# EAGLE board ESP32-S2_Thing_Plus-Panel (EAGLE 9.6.2), part 1 of 5
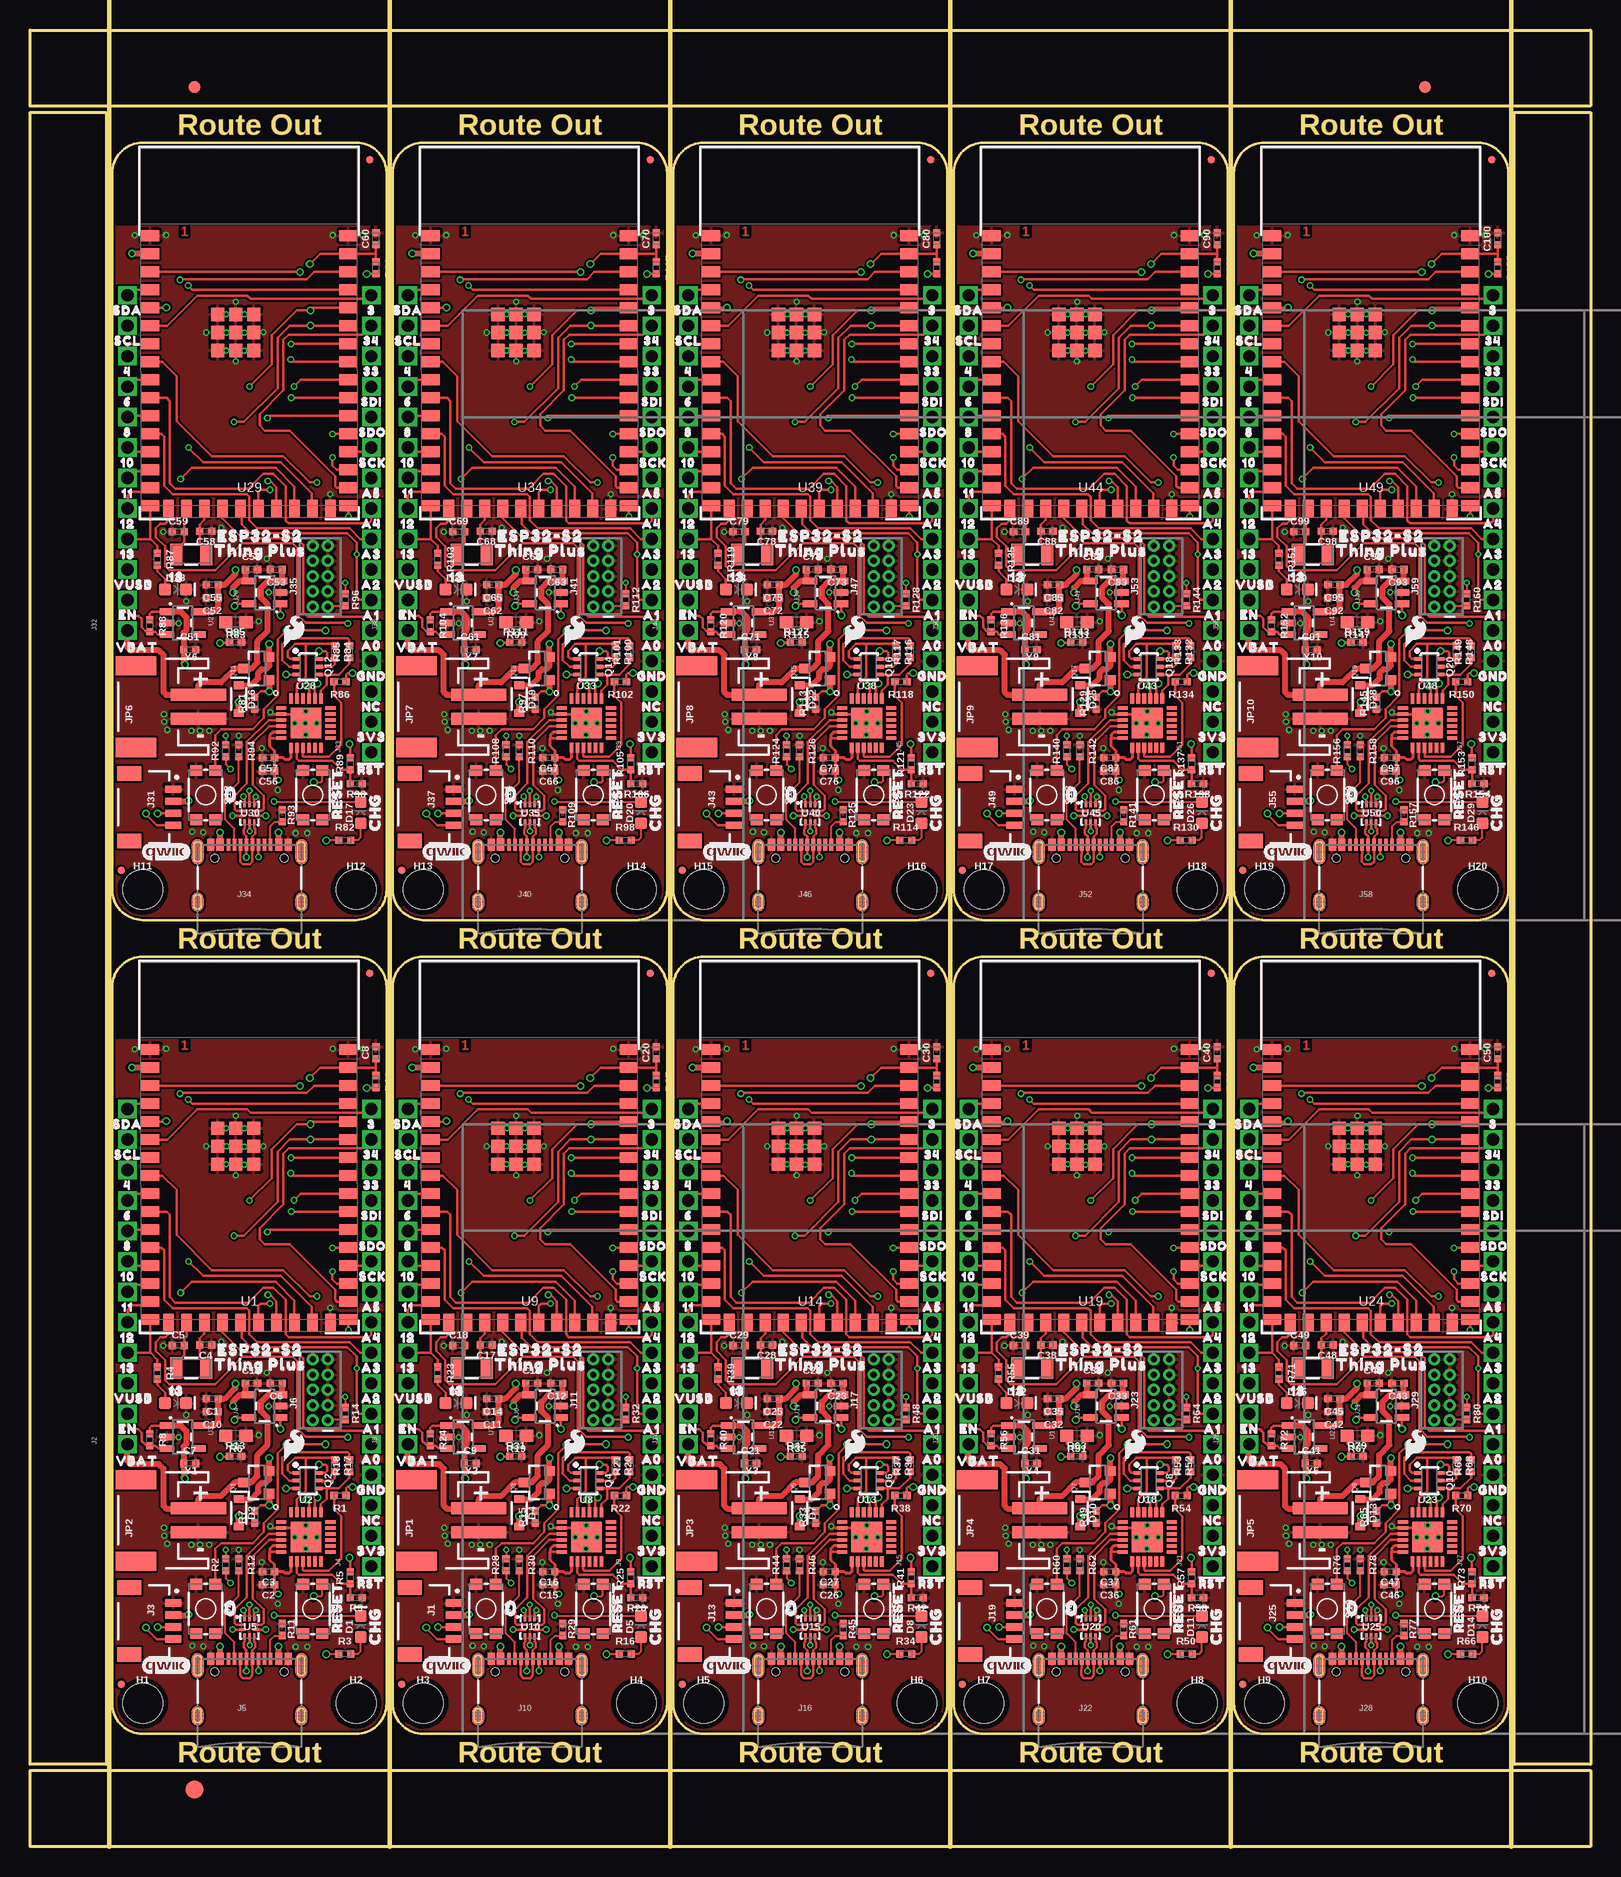
[diagram p0: board, top side]
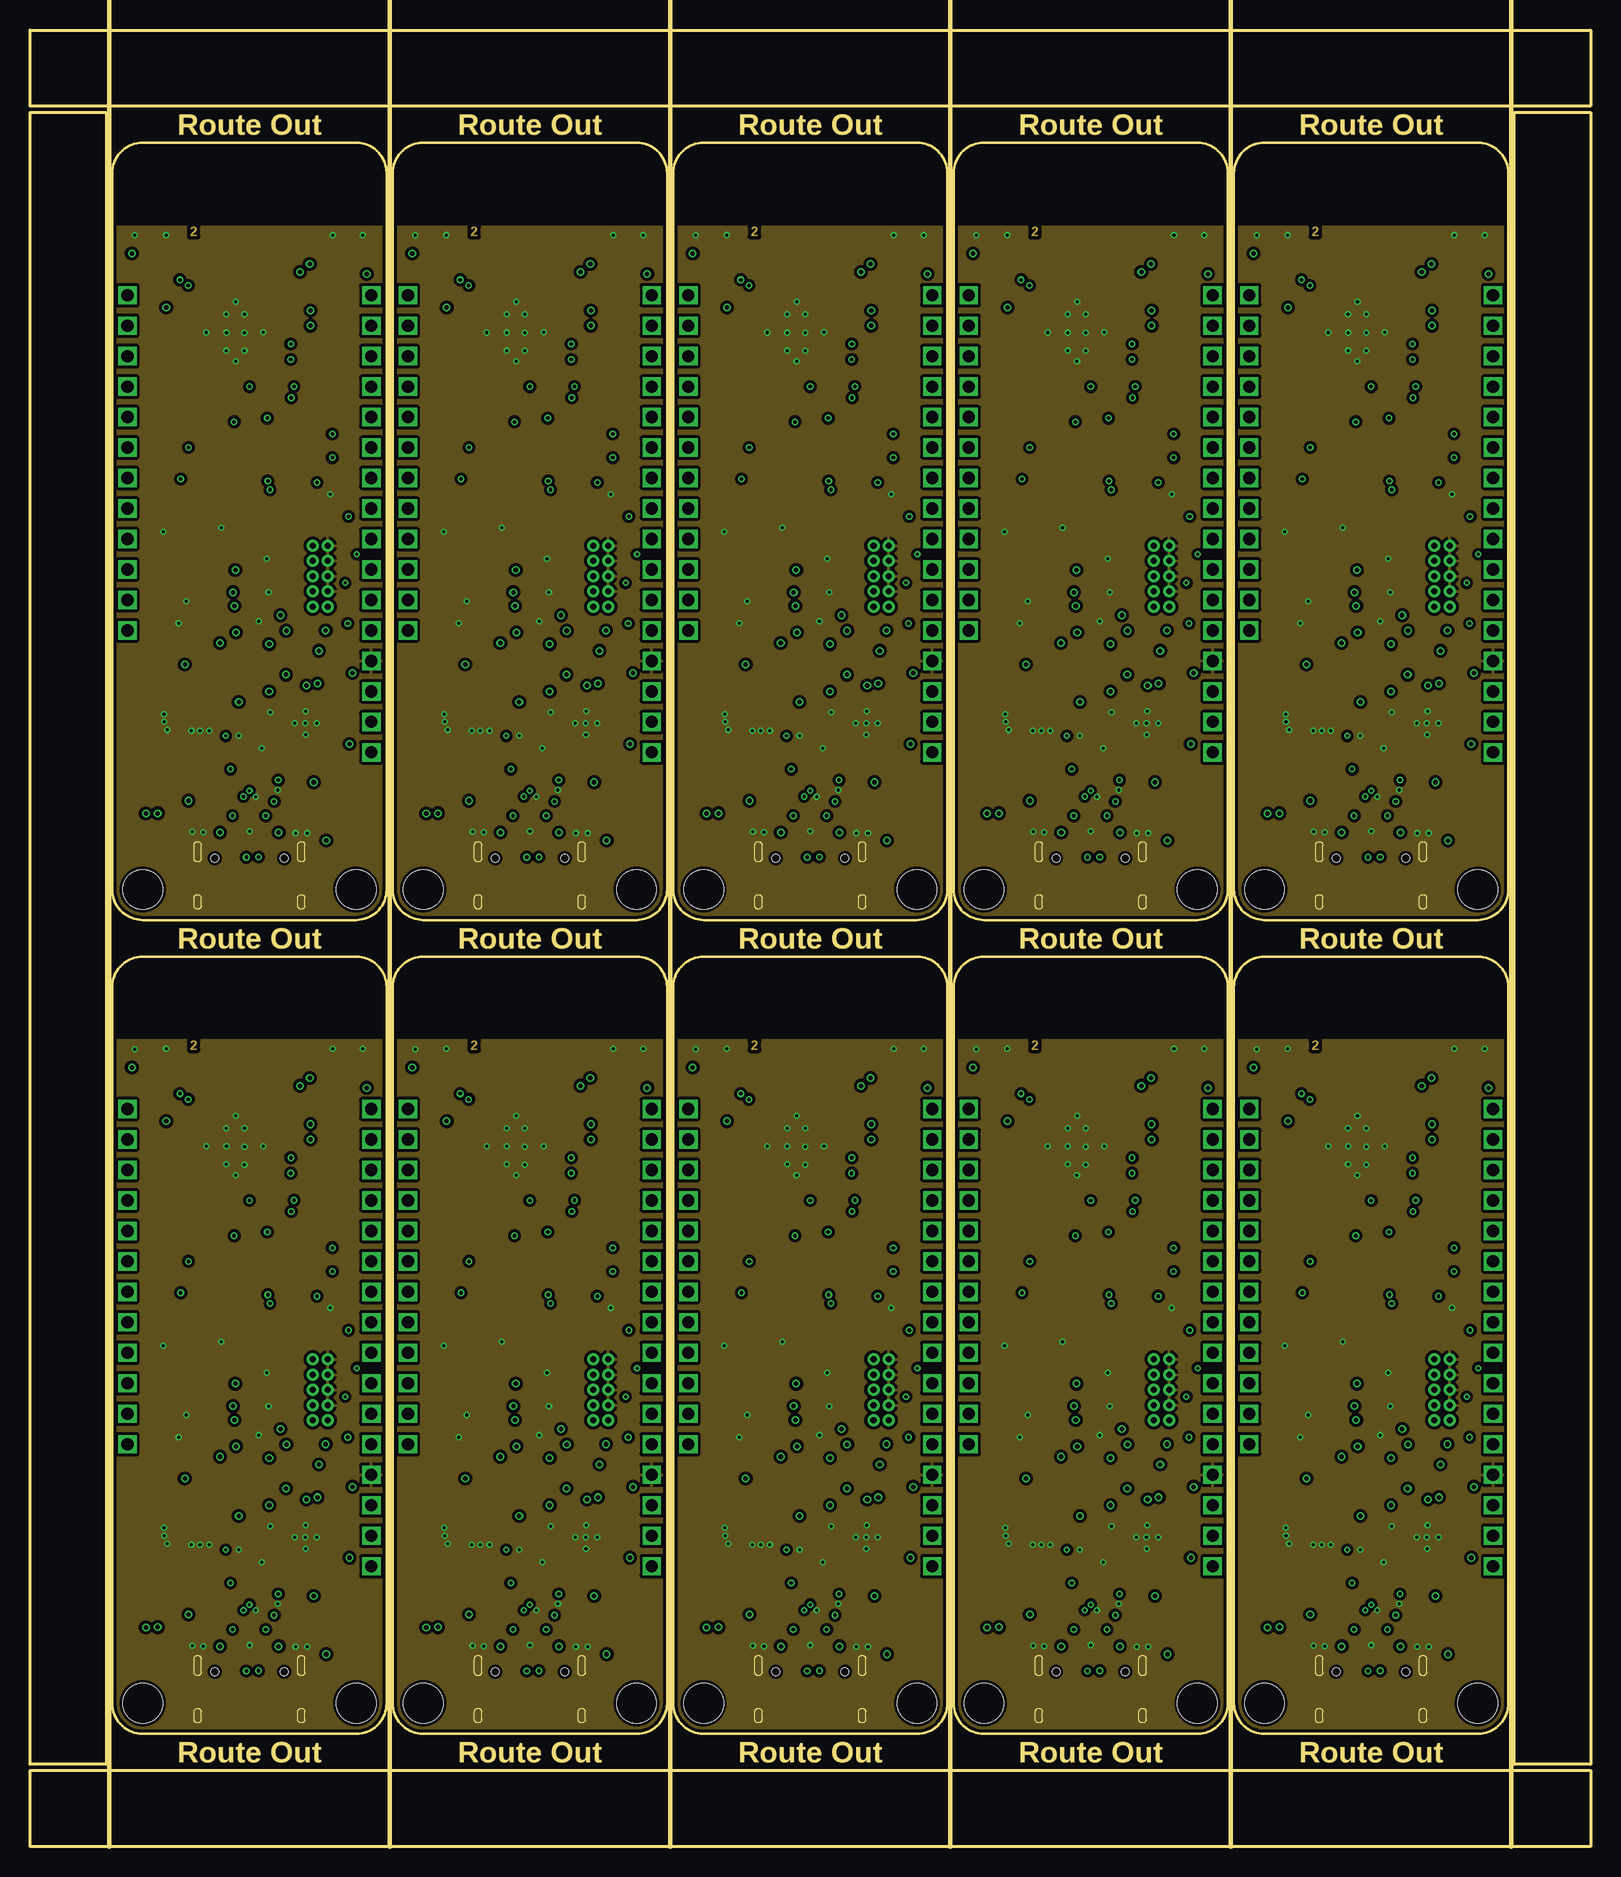
[diagram p1: board, inner layer Route2]
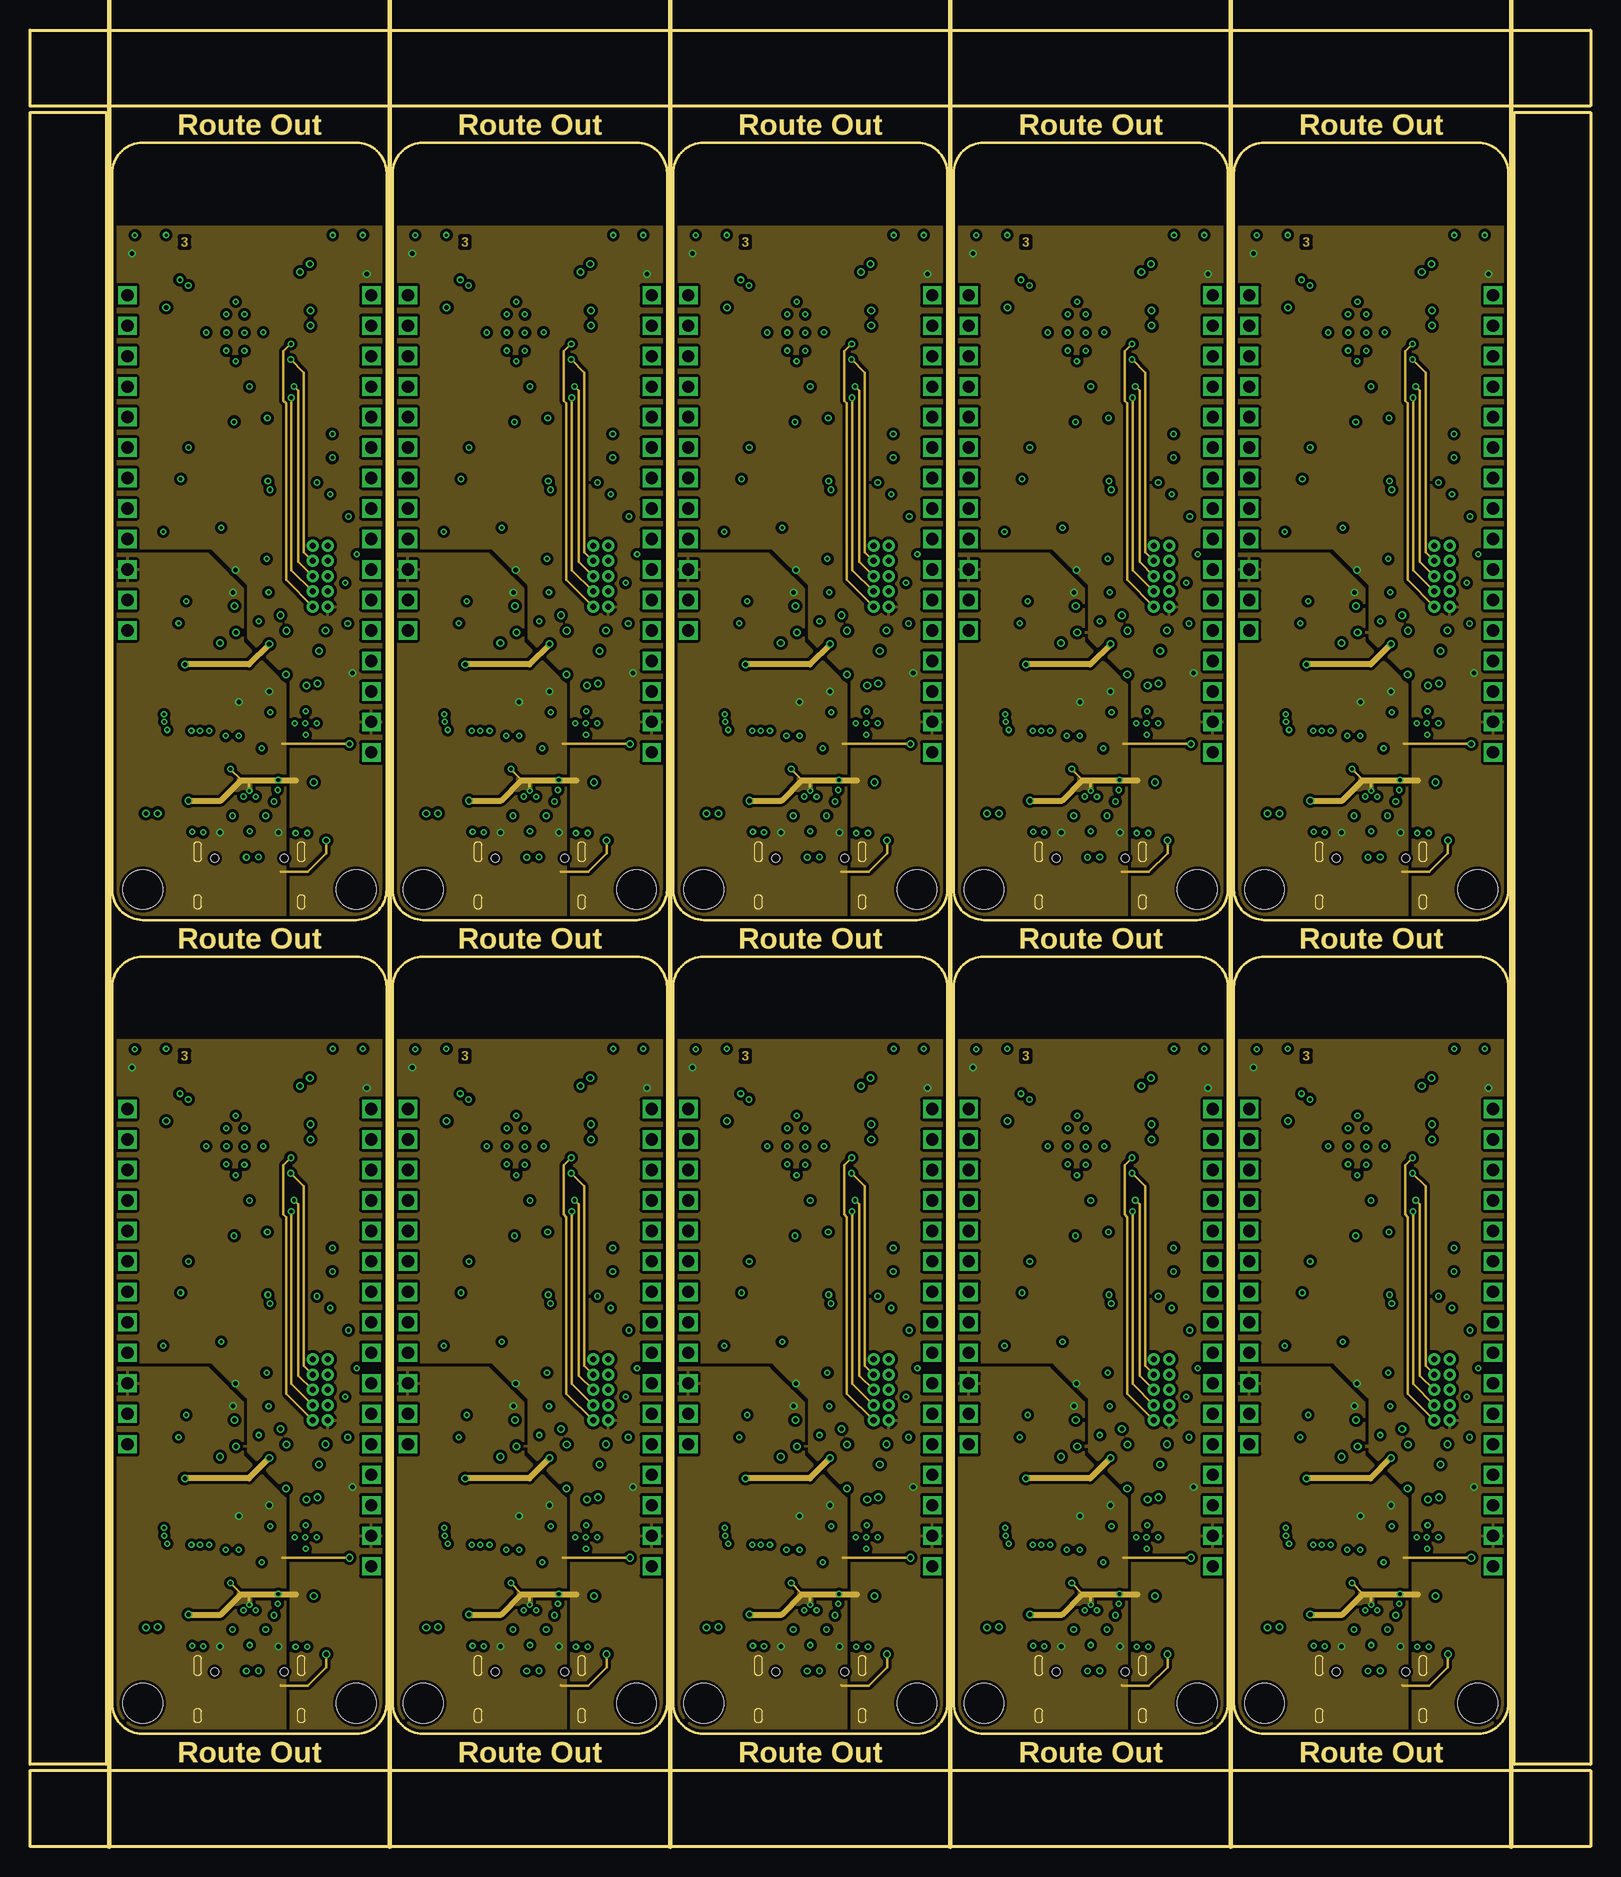
[diagram p2: board, inner layer Route15]
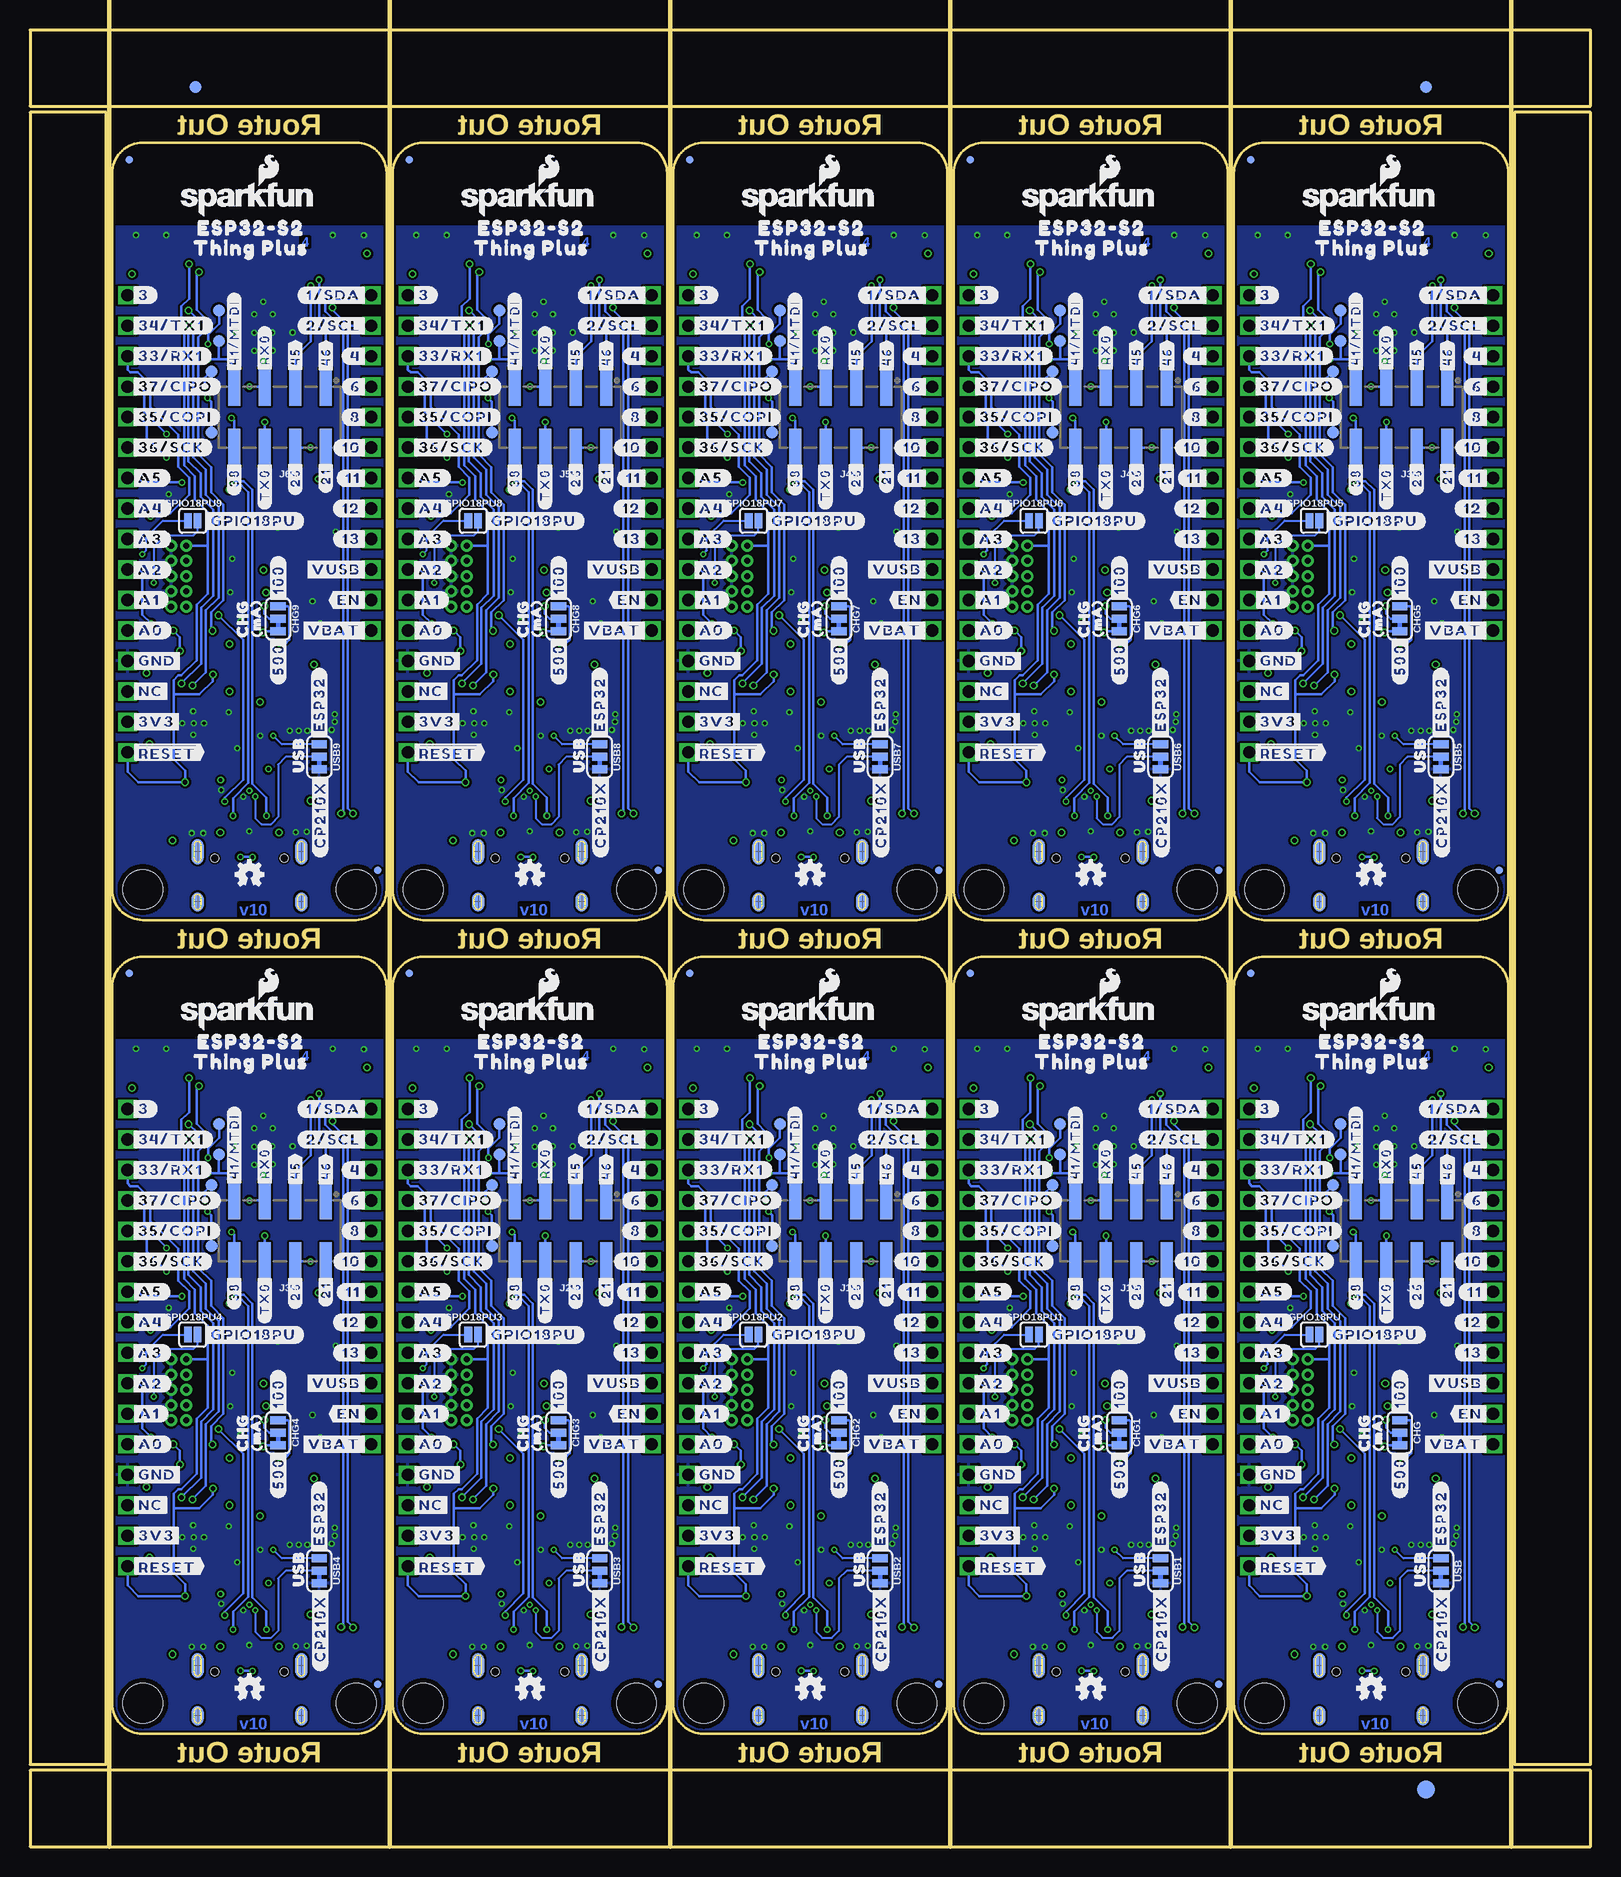
[diagram p3: board, bottom side, seen from below]

Size 130.05 x 151.38 mm. Coordinates in mm from the lower left corner, seen from the top.
Outline: 29.72,11.94 29.72,71.63 arc90 27.18,74.17 9.4,74.17 arc90 6.86,71.63 6.86,11.94 arc90 9.4,9.4 27.18,9.4 arc90 29.72,11.94
Outline: 53.09,11.94 53.09,71.63 arc90 50.55,74.17 32.77,74.17 arc90 30.23,71.63 30.23,11.94 arc90 32.77,9.4 50.55,9.4 arc90 53.09,11.94
Outline: 76.45,11.94 76.45,71.63 arc90 73.91,74.17 56.13,74.17 arc90 53.59,71.63 53.59,11.94 arc90 56.13,9.4 73.91,9.4 arc90 76.45,11.94
Outline: 99.82,11.94 99.82,71.63 arc90 97.28,74.17 79.5,74.17 arc90 76.96,71.63 76.96,11.94 arc90 79.5,9.4 97.28,9.4 arc90 99.82,11.94
Outline: 123.19,11.94 123.19,71.63 arc90 120.65,74.17 102.87,74.17 arc90 100.33,71.63 100.33,11.94 arc90 102.87,9.4 120.65,9.4 arc90 123.19,11.94
Outline: 29.72,79.76 29.72,139.45 arc90 27.18,141.99 9.4,141.99 arc90 6.86,139.45 6.86,79.76 arc90 9.4,77.22 27.18,77.22 arc90 29.72,79.76
Outline: 53.09,79.76 53.09,139.45 arc90 50.55,141.99 32.77,141.99 arc90 30.23,139.45 30.23,79.76 arc90 32.77,77.22 50.55,77.22 arc90 53.09,79.76
Outline: 76.45,79.76 76.45,139.45 arc90 73.91,141.99 56.13,141.99 arc90 53.59,139.45 53.59,79.76 arc90 56.13,77.22 73.91,77.22 arc90 76.45,79.76
Outline: 99.82,79.76 99.82,139.45 arc90 97.28,141.99 79.5,141.99 arc90 76.96,139.45 76.96,79.76 arc90 79.5,77.22 97.28,77.22 arc90 99.82,79.76
Outline: 123.19,79.76 123.19,139.45 arc90 120.65,141.99 102.87,141.99 arc90 100.33,139.45 100.33,79.76 arc90 102.87,77.22 120.65,77.22 arc90 123.19,79.76
Outline: 0,6.35 130.05,6.35 130.05,0 0,0 0,6.35
Outline: 123.7,144.53 130.05,144.53 130.05,6.86 123.7,6.86 123.7,144.53
Outline: 0,151.38 130.05,151.38 130.05,145.03 0,145.03 0,151.38
Outline: 0,144.53 6.35,144.53 6.35,6.86 0,6.86 0,144.53
Copper layers (1*2*15*16): Top 0.035559375mm / dielectric 0.47751875mm / Route2 0.035559375mm / dielectric 0.47751875mm / Route15 0.035559375mm / dielectric 0.47751875mm / Bottom 0.035559375mm
Design rules "ESP32-S2_Thing_Plus": minimum track width 5mil, minimum drill 0.2mm, track to track 5mil, track to pad 5mil, pad to pad 5mil, via to via 5mil, smd to smd 5mil, copper to edge 7mil, drill to drill 7mil, minimum pad ring 5mil, minimum via ring 5mil, stop-mask expansion 2.5mil, vias tented up to drill 25mil, thermal gap 10mil
tRestrict: area 24.4,25.7 to 24.4,25.9; area 21.6,25.7 to 21.6,26; area 22.9,24.4 to 23.1,24.5; area 22.8,27.2 to 23.1,27.2; area 47.7,25.7 to 47.8,25.9; area 44.9,25.7 to 45,26; area 46.2,24.4 to 46.5,24.5; area 46.2,27.2 to 46.5,27.2; area 71.1,25.7 to 71.2,25.9; area 68.3,25.7 to 68.4,26; area 69.6,24.4 to 69.8,24.5; area 69.6,27.2 to 69.8,27.2; area 94.5,25.7 to 94.5,25.9; area 91.7,25.7 to 91.7,26; area 93,24.4 to 93.2,24.5; area 92.9,27.2 to 93.2,27.2; area 117.8,25.7 to 117.9,25.9; area 115,25.7 to 115.1,26; area 116.3,24.4 to 116.6,24.5; area 116.3,27.2 to 116.6,27.2; area 24.4,93.5 to 24.4,93.8; area 21.6,93.5 to 21.6,93.8; area 22.9,92.2 to 23.1,92.3; area 22.8,95 to 23.1,95.1; area 47.7,93.5 to 47.8,93.8; area 44.9,93.5 to 45,93.8; area 46.2,92.2 to 46.5,92.3; area 46.2,95 to 46.5,95.1; area 71.1,93.5 to 71.2,93.8; area 68.3,93.5 to 68.4,93.8; area 69.6,92.2 to 69.8,92.3; area 69.6,95 to 69.8,95.1; area 94.5,93.5 to 94.5,93.8; area 91.7,93.5 to 91.7,93.8; area 93,92.2 to 93.2,92.3; area 92.9,95 to 93.2,95.1; area 117.8,93.5 to 117.9,93.8; area 115,93.5 to 115.1,93.8; area 116.3,92.2 to 116.6,92.3; area 116.3,95 to 116.6,95.1
Milling: 6 lines

## Footprints (pad centres in the part's own frame; a part is rotated, then mirrored left to right if it is on the bottom)
0402-TIGHT = smd 0.6 x 0.6: 1 -0.5,0; 2 0.5,0
SMT-JUMPER_3_1-NC_TRACE_SILK = smd 0.66 x 1.27: 1 -1.041,0; 2 0,0; 3 1.041,0
LED-0603 = smd 1 x 1: A -0.877,0; C 0.877,0
SOD-323 = smd 0.63 x 0.83: A 1.15,0; C -1.15,0
FIDUCIAL-1X2 = smd 1 x 1: 1 0,0
FIDUCIAL-1.5X3 = smd 1.5 x 1.5: 1 0,0
FIDUCIAL-MICRO = smd 0.635 x 0.635: 1 0,0
SMT-JUMPER_2_NO_SILK = smd 0.635 x 1.27: 1 -0.406,0; 2 0.406,0
STAND-OFF = hole 3.302: 0,0
JST04_1MM_RA = smd 0.6 x 1.35: 1 -1.5,0; 2 -0.5,0; 3 0.5,0; 4 1.5,0 | smd 1.2 x 2: NC1 2.8,-3.675; NC2 -2.8,-3.675
1X12_SM_SQ_NOSILK = drill 1.016 pad 1.27 square: 1 0,0; 2 2.54,0; 3 5.08,0; 4 7.62,0; 5 10.16,0; 6 12.7,0; 7 15.24,0; 8 17.78,0; 9 20.32,0; 10 22.86,0; 11 25.4,0; 12 27.94,0
1X16_SM_SQ_NOSILK = drill 1.016 pad 1.27 square: 1 0,0; 2 2.54,0; 3 5.08,0; 4 7.62,0; 5 10.16,0; 6 12.7,0; 7 15.24,0; 8 17.78,0; 9 20.32,0; 10 22.86,0; 11 25.4,0; 12 27.94,0; 13 30.48,0; 14 33.02,0; 15 35.56,0; 16 38.1,0
USB-C-16P-4LAYER-ISOLATED = smd 0.3 x 1: A5 -1.25,-0.34; A6 -0.25,-0.34; A7 0.25,-0.34; A8 1.25,-0.34; B5 1.75,-0.34; B6 0.75,-0.34; B7 -0.75,-0.34; B8 -1.75,-0.34 | smd 0.6 x 1: GND -3.225,-0.34; GND2 3.225,-0.34; VBUS1 -2.45,-0.34; VBUS2 2.45,-0.34 | smd 1 x 2.1: SHLD1 -4.32,-0.915; SHLD2 4.32,-0.915 | smd 1 x 2.1 bottom: SHLD3 -4.32,-0.915; SHLD4 4.32,-0.915 | smd 1 x 1.6: SHLD5 -4.32,-5.095; SHLD8 4.32,-5.095 | smd 1 x 1.6 bottom: SHLD6 -4.32,-5.095; SHLD7 4.32,-5.095 | hole 0.65: -2.89,-1.445; 2.89,-1.445
2X5-PTH-1.27MM-NO_SILK = drill 0.508 pad 1: 1 -2.54,-0.635; 2 -2.54,0.635; 3 -1.27,-0.635; 4 -1.27,0.635; 5 0,-0.635; 6 0,0.635; 7 1.27,-0.635; 8 1.27,0.635; 9 2.54,-0.635; 10 2.54,0.635
2X4_SMT_NO_POSTS_NS = smd 1 x 3.17: 1 -3.81,-2.54; 2 -3.81,2.54; 3 -1.27,-2.54; 4 -1.27,2.54; 5 1.27,-2.54; 6 1.27,2.54; 7 3.81,-2.54; 8 3.81,2.54
JST-2-SMD = smd 1 x 4.6: 1 -1,-3.7; 2 1,-3.7 | smd 1.6 x 3.4: NC1 -3.4,1.5; NC2 3.4,1.5
SOT23-3@1 = smd 0.8 x 0.9: 1 -0.95,-1; 2 0.95,-1; 3 0,1.1
SC70-6 = smd 0.3 x 0.66: 1 -0.65,-0.92; 2 0,-0.92; 3 0.65,-0.92; 4 0.65,0.92; 5 0,0.92; 6 -0.65,0.92
0603 = smd 1.1 x 1: 1 -0.85,0; 2 0.85,0
TACTILE_SWITCH_SMD_4.6X2.8MM = smd 0.9 x 1: 1 -2.05,-0.8; 2 2.05,-0.8; 3 2.05,0.8; 4 -2.05,0.8
TP_15TH = drill 0.381 pad 0.61: P$1 0,0
PAD.03X.04 = smd 1.016 x 1.016: P$1 0,0
ESP32-S2-WROOM = smd 0.9 x 1.5: 1 11.94,8.25; 2 10.44,8.25; 3 8.94,8.25; 4 7.44,8.25; 5 5.94,8.25; 6 4.44,8.25; 7 2.94,8.25; 8 1.44,8.25; 9 -0.06,8.25; 10 -1.56,8.25; 11 -3.06,8.25; 12 -4.56,8.25; 13 -6.06,8.25; 14 -7.56,8.25; 15 -9.06,8.25; 16 -10.56,8.25; 27 -10.56,-8.24; 28 -9.06,-8.24; 29 -7.56,-8.24; 30 -6.06,-8.24; 31 -4.56,-8.24; 32 -3.06,-8.24; 33 -1.56,-8.24; 34 -0.06,-8.24; 35 1.44,-8.24; 36 2.94,-8.24; 37 4.44,-8.24; 38 5.94,-8.24; 39 7.44,-8.24; 40 8.94,-8.24; 41 10.44,-8.24; 42 11.94,-8.24 | smd 1.5 x 0.9: 17 -10.82,6.75; 18 -10.82,5.25; 19 -10.82,3.75; 20 -10.82,2.25; 21 -10.82,0.75; 22 -10.82,-0.75; 23 -10.82,-2.25; 24 -10.82,-3.75; 25 -10.82,-5.25; 26 -10.82,-6.75 | smd 1.1 x 1.1: GNDEP0 3.88,1.15; GNDEP1 5.38,-0.35; GNDEP2 5.38,1.15; GNDEP3 5.38,2.65; GNDEP4 3.88,2.65; GNDEP5 2.38,2.65; GNDEP6 2.38,1.15; GNDEP7 2.38,-0.35; GNDEP8 3.88,-0.35
QFN24 = smd 0.85 x 0.3: 1 -2.05,1.25; 2 -2.05,0.75; 3 -2.05,0.25; 4 -2.05,-0.25; 5 -2.05,-0.75; 6 -2.05,-1.25; 13 2.05,-1.25; 14 2.05,-0.75; 15 2.05,-0.25; 16 2.05,0.25; 17 2.05,0.75; 18 2.05,1.25 | smd 0.3 x 0.85: 7 -1.25,-2.05; 8 -0.75,-2.05; 9 -0.25,-2.05; 10 0.25,-2.05; 11 0.75,-2.05; 12 1.25,-2.05; 19 1.25,2.05; 20 0.75,2.05; 21 0.25,2.05; 22 -0.25,2.05; 23 -0.75,2.05; 24 -1.25,2.05 | smd 2.55 x 2.55: PAD 0,0
SOT23-5 = smd 0.55 x 1.2: 1 -0.95,-1.3; 2 0,-1.3; 3 0.95,-1.3; 4 0.95,1.3; 5 -0.95,1.3
UQFN10 = smd 0.5 x 0.205: 1 -0.555,0.2; 2 -0.552,-0.2; 6 0.54,-0.2; 7 0.54,0.2 | smd 0.205 x 0.5: 3 -0.4,-0.74; 4 0,-0.74; 5 0.4,-0.74; 8 0.4,0.74; 9 0,0.743; 10 -0.4,0.743
CRYSTAL-SMD-3.2X1.5MM = smd 1 x 1.8: P$1 -1.25,0; P$2 1.25,0

## Placement (x,y rotation side)
C1  10uF  [0402-TIGHT]  15.19,37.33 180 top
C2  0.1uF  [0402-TIGHT]  19.87,21.81 180 top
C3  4.7uF  [0402-TIGHT]  19.87,22.91 180 top
C4  15pF  [0402-TIGHT]  14.64,41.8 180 top
C5  15pF  [0402-TIGHT]  12.35,41.76 0 top
C6  4.7uF  [0402-TIGHT]  20.52,38.6 180 top
C7  1.0uF  [0402-TIGHT]  13.31,31.93 0 top
C8  0.1uF  [0402-TIGHT]  28.83,66.17 90 top
C9  1.0uF  [0402-TIGHT]  36.68,31.93 0 top
C10  1.0uF  [0402-TIGHT]  15.18,36.24 180 top
C11  1.0uF  [0402-TIGHT]  38.55,36.24 180 top
C12  4.7uF  [0402-TIGHT]  43.89,38.6 180 top
C13  4.7uF  [0402-TIGHT]  41.82,38.61 0 top
C14  10uF  [0402-TIGHT]  38.56,37.33 180 top
C15  0.1uF  [0402-TIGHT]  43.24,21.81 180 top
C16  4.7uF  [0402-TIGHT]  43.24,22.91 180 top
C17  15pF  [0402-TIGHT]  38.01,41.8 180 top
C18  15pF  [0402-TIGHT]  35.72,41.76 0 top
C19  4.7uF  [0402-TIGHT]  18.45,38.61 0 top
C20  0.1uF  [0402-TIGHT]  52.2,66.17 90 top
C21  1.0uF  [0402-TIGHT]  60.05,31.93 0 top
C22  1.0uF  [0402-TIGHT]  61.92,36.24 180 top
C23  4.7uF  [0402-TIGHT]  67.26,38.6 180 top
C24  4.7uF  [0402-TIGHT]  65.19,38.61 0 top
C25  10uF  [0402-TIGHT]  61.93,37.33 180 top
C26  0.1uF  [0402-TIGHT]  66.6,21.81 180 top
C27  4.7uF  [0402-TIGHT]  66.61,22.91 180 top
C28  15pF  [0402-TIGHT]  61.38,41.8 180 top
C29  15pF  [0402-TIGHT]  59.09,41.76 0 top
C30  0.1uF  [0402-TIGHT]  75.56,66.17 90 top
C31  1.0uF  [0402-TIGHT]  83.41,31.93 0 top
C32  1.0uF  [0402-TIGHT]  85.29,36.24 180 top
C33  4.7uF  [0402-TIGHT]  90.62,38.6 180 top
C34  4.7uF  [0402-TIGHT]  88.56,38.61 0 top
C35  10uF  [0402-TIGHT]  85.3,37.33 180 top
C36  0.1uF  [0402-TIGHT]  89.97,21.81 180 top
C37  4.7uF  [0402-TIGHT]  89.97,22.91 180 top
C38  15pF  [0402-TIGHT]  84.74,41.8 180 top
C39  15pF  [0402-TIGHT]  82.46,41.76 0 top
C40  0.1uF  [0402-TIGHT]  98.93,66.17 90 top
C41  1.0uF  [0402-TIGHT]  106.78,31.93 0 top
C42  1.0uF  [0402-TIGHT]  108.65,36.24 180 top
C43  4.7uF  [0402-TIGHT]  113.99,38.6 180 top
C44  4.7uF  [0402-TIGHT]  111.93,38.61 0 top
C45  10uF  [0402-TIGHT]  108.66,37.33 180 top
C46  0.1uF  [0402-TIGHT]  113.34,21.81 180 top
C47  4.7uF  [0402-TIGHT]  113.34,22.91 180 top
C48  15pF  [0402-TIGHT]  108.11,41.8 180 top
C49  15pF  [0402-TIGHT]  105.82,41.76 0 top
C50  0.1uF  [0402-TIGHT]  122.3,66.17 90 top
C51  1.0uF  [0402-TIGHT]  13.31,99.75 0 top
C52  1.0uF  [0402-TIGHT]  15.18,104.05 180 top
C53  4.7uF  [0402-TIGHT]  20.52,106.42 180 top
C54  4.7uF  [0402-TIGHT]  18.45,106.43 0 top
C55  10uF  [0402-TIGHT]  15.19,105.15 180 top
C56  0.1uF  [0402-TIGHT]  19.87,89.63 180 top
C57  4.7uF  [0402-TIGHT]  19.87,90.73 180 top
C58  15pF  [0402-TIGHT]  14.64,109.62 180 top
C59  15pF  [0402-TIGHT]  12.35,109.58 0 top
C60  0.1uF  [0402-TIGHT]  28.83,133.99 90 top
C61  1.0uF  [0402-TIGHT]  36.68,99.75 0 top
C62  1.0uF  [0402-TIGHT]  38.55,104.05 180 top
C63  4.7uF  [0402-TIGHT]  43.89,106.42 180 top
C64  4.7uF  [0402-TIGHT]  41.82,106.43 0 top
C65  10uF  [0402-TIGHT]  38.56,105.15 180 top
C66  0.1uF  [0402-TIGHT]  43.24,89.63 180 top
C67  4.7uF  [0402-TIGHT]  43.24,90.73 180 top
C68  15pF  [0402-TIGHT]  38.01,109.62 180 top
C69  15pF  [0402-TIGHT]  35.72,109.58 0 top
C70  0.1uF  [0402-TIGHT]  52.2,133.99 90 top
C71  1.0uF  [0402-TIGHT]  60.05,99.75 0 top
C72  1.0uF  [0402-TIGHT]  61.92,104.05 180 top
C73  4.7uF  [0402-TIGHT]  67.26,106.42 180 top
C74  4.7uF  [0402-TIGHT]  65.19,106.43 0 top
C75  10uF  [0402-TIGHT]  61.93,105.15 180 top
C76  0.1uF  [0402-TIGHT]  66.6,89.63 180 top
C77  4.7uF  [0402-TIGHT]  66.61,90.73 180 top
C78  15pF  [0402-TIGHT]  61.38,109.62 180 top
C79  15pF  [0402-TIGHT]  59.09,109.58 0 top
C80  0.1uF  [0402-TIGHT]  75.56,133.99 90 top
C81  1.0uF  [0402-TIGHT]  83.41,99.75 0 top
C82  1.0uF  [0402-TIGHT]  85.29,104.05 180 top
C83  4.7uF  [0402-TIGHT]  90.62,106.42 180 top
C84  4.7uF  [0402-TIGHT]  88.56,106.43 0 top
C85  10uF  [0402-TIGHT]  85.3,105.15 180 top
C86  0.1uF  [0402-TIGHT]  89.97,89.63 180 top
C87  4.7uF  [0402-TIGHT]  89.97,90.73 180 top
C88  15pF  [0402-TIGHT]  84.74,109.62 180 top
C89  15pF  [0402-TIGHT]  82.46,109.58 0 top
C90  0.1uF  [0402-TIGHT]  98.93,133.99 90 top
C91  1.0uF  [0402-TIGHT]  106.78,99.75 0 top
C92  1.0uF  [0402-TIGHT]  108.65,104.05 180 top
C93  4.7uF  [0402-TIGHT]  113.99,106.42 180 top
C94  4.7uF  [0402-TIGHT]  111.93,106.43 0 top
C95  10uF  [0402-TIGHT]  108.66,105.15 180 top
C96  0.1uF  [0402-TIGHT]  113.34,89.63 180 top
C97  4.7uF  [0402-TIGHT]  113.34,90.73 180 top
C98  15pF  [0402-TIGHT]  108.11,109.62 180 top
C99  15pF  [0402-TIGHT]  105.82,109.58 0 top
C100  0.1uF  [0402-TIGHT]  122.3,133.99 90 top
CHG  [SMT-JUMPER_3_1-NC_TRACE_SILK]  15.9,34.49 270 bottom
CHG1  [SMT-JUMPER_3_1-NC_TRACE_SILK]  39.27,34.49 270 bottom
CHG2  [SMT-JUMPER_3_1-NC_TRACE_SILK]  62.64,34.49 270 bottom
CHG3  [SMT-JUMPER_3_1-NC_TRACE_SILK]  86,34.49 270 bottom
CHG4  [SMT-JUMPER_3_1-NC_TRACE_SILK]  109.37,34.49 270 bottom
CHG5  [SMT-JUMPER_3_1-NC_TRACE_SILK]  15.9,102.31 270 bottom
CHG6  [SMT-JUMPER_3_1-NC_TRACE_SILK]  39.27,102.31 270 bottom
CHG7  [SMT-JUMPER_3_1-NC_TRACE_SILK]  62.64,102.31 270 bottom
CHG8  [SMT-JUMPER_3_1-NC_TRACE_SILK]  86,102.31 270 bottom
CHG9  [SMT-JUMPER_3_1-NC_TRACE_SILK]  109.37,102.31 270 bottom
D1  Yellow  [LED-0603]  27.56,18.34 90 top
D2  1A/23V/620mV  [SOD-323]  17.4,27.81 270 top
D3  BLUE  [LED-0603]  12.14,36.96 0 top
D4  1A/23V/620mV  [SOD-323]  40.77,27.81 270 top
D5  Yellow  [LED-0603]  50.93,18.34 90 top
D6  BLUE  [LED-0603]  35.5,36.96 0 top
D7  1A/23V/620mV  [SOD-323]  64.14,27.81 270 top
D8  Yellow  [LED-0603]  74.3,18.34 90 top
D9  BLUE  [LED-0603]  58.87,36.96 0 top
D10  1A/23V/620mV  [SOD-323]  87.5,27.81 270 top
D11  Yellow  [LED-0603]  97.66,18.34 90 top
D12  BLUE  [LED-0603]  82.24,36.96 0 top
D13  1A/23V/620mV  [SOD-323]  110.87,27.81 270 top
D14  Yellow  [LED-0603]  121.03,18.34 90 top
D15  BLUE  [LED-0603]  105.61,36.96 0 top
D16  1A/23V/620mV  [SOD-323]  17.4,95.63 270 top
D17  Yellow  [LED-0603]  27.56,86.16 90 top
D18  BLUE  [LED-0603]  12.14,104.77 0 top
D19  1A/23V/620mV  [SOD-323]  40.77,95.63 270 top
D20  Yellow  [LED-0603]  50.93,86.16 90 top
D21  BLUE  [LED-0603]  35.5,104.77 0 top
D22  1A/23V/620mV  [SOD-323]  64.14,95.63 270 top
D23  Yellow  [LED-0603]  74.3,86.16 90 top
D24  BLUE  [LED-0603]  58.87,104.77 0 top
D25  1A/23V/620mV  [SOD-323]  87.5,95.63 270 top
D26  Yellow  [LED-0603]  97.66,86.16 90 top
D27  BLUE  [LED-0603]  82.24,104.77 0 top
D28  1A/23V/620mV  [SOD-323]  110.87,95.63 270 top
D29  Yellow  [LED-0603]  121.03,86.16 90 top
D30  BLUE  [LED-0603]  105.61,104.77 0 top
E$1  [FIDUCIAL-1X2]  13.72,146.62 0 top
E$2  [FIDUCIAL-1X2]  13.72,146.62 0 bottom
E$3  [FIDUCIAL-1X2]  116.27,146.62 0 top
E$4  [FIDUCIAL-1X2]  116.27,146.62 0 bottom
E$5  [FIDUCIAL-1.5X3]  13.72,4.76 0 top
E$6  [FIDUCIAL-1.5X3]  13.72,4.76 0 bottom
FD1  FIDUCIALUFIDUCIAL  [FIDUCIAL-MICRO]  28.32,72.77 0 top
FD2  FIDUCIALUFIDUCIAL  [FIDUCIAL-MICRO]  28.32,72.77 0 bottom
FD3  FIDUCIALUFIDUCIAL  [FIDUCIAL-MICRO]  7.6,13.54 0 top
FD4  FIDUCIALUFIDUCIAL  [FIDUCIAL-MICRO]  7.6,13.54 0 bottom
FD5  FIDUCIALUFIDUCIAL  [FIDUCIAL-MICRO]  51.69,72.77 0 top
FD6  FIDUCIALUFIDUCIAL  [FIDUCIAL-MICRO]  51.69,72.77 0 bottom
FD7  FIDUCIALUFIDUCIAL  [FIDUCIAL-MICRO]  30.97,13.54 0 top
FD8  FIDUCIALUFIDUCIAL  [FIDUCIAL-MICRO]  30.97,13.54 0 bottom
FD9  FIDUCIALUFIDUCIAL  [FIDUCIAL-MICRO]  75.06,72.77 0 top
FD10  FIDUCIALUFIDUCIAL  [FIDUCIAL-MICRO]  75.06,72.77 0 bottom
FD11  FIDUCIALUFIDUCIAL  [FIDUCIAL-MICRO]  54.34,13.54 0 top
FD12  FIDUCIALUFIDUCIAL  [FIDUCIAL-MICRO]  54.34,13.54 0 bottom
FD13  FIDUCIALUFIDUCIAL  [FIDUCIAL-MICRO]  98.42,72.77 0 top
FD14  FIDUCIALUFIDUCIAL  [FIDUCIAL-MICRO]  98.42,72.77 0 bottom
FD15  FIDUCIALUFIDUCIAL  [FIDUCIAL-MICRO]  77.71,13.54 0 top
FD16  FIDUCIALUFIDUCIAL  [FIDUCIAL-MICRO]  77.71,13.54 0 bottom
FD17  FIDUCIALUFIDUCIAL  [FIDUCIAL-MICRO]  121.79,72.77 0 top
FD18  FIDUCIALUFIDUCIAL  [FIDUCIAL-MICRO]  121.79,72.77 0 bottom
FD19  FIDUCIALUFIDUCIAL  [FIDUCIAL-MICRO]  101.07,13.54 0 top
FD20  FIDUCIALUFIDUCIAL  [FIDUCIAL-MICRO]  101.07,13.54 0 bottom
FD21  FIDUCIALUFIDUCIAL  [FIDUCIAL-MICRO]  28.32,140.59 0 top
FD22  FIDUCIALUFIDUCIAL  [FIDUCIAL-MICRO]  28.32,140.59 0 bottom
FD23  FIDUCIALUFIDUCIAL  [FIDUCIAL-MICRO]  7.6,81.36 0 top
FD24  FIDUCIALUFIDUCIAL  [FIDUCIAL-MICRO]  7.6,81.36 0 bottom
FD25  FIDUCIALUFIDUCIAL  [FIDUCIAL-MICRO]  51.69,140.59 0 top
FD26  FIDUCIALUFIDUCIAL  [FIDUCIAL-MICRO]  51.69,140.59 0 bottom
FD27  FIDUCIALUFIDUCIAL  [FIDUCIAL-MICRO]  30.97,81.36 0 top
FD28  FIDUCIALUFIDUCIAL  [FIDUCIAL-MICRO]  30.97,81.36 0 bottom
FD29  FIDUCIALUFIDUCIAL  [FIDUCIAL-MICRO]  75.06,140.59 0 top
FD30  FIDUCIALUFIDUCIAL  [FIDUCIAL-MICRO]  75.06,140.59 0 bottom
FD31  FIDUCIALUFIDUCIAL  [FIDUCIAL-MICRO]  54.34,81.36 0 top
FD32  FIDUCIALUFIDUCIAL  [FIDUCIAL-MICRO]  54.34,81.36 0 bottom
FD33  FIDUCIALUFIDUCIAL  [FIDUCIAL-MICRO]  98.42,140.59 0 top
FD34  FIDUCIALUFIDUCIAL  [FIDUCIAL-MICRO]  98.42,140.59 0 bottom
FD35  FIDUCIALUFIDUCIAL  [FIDUCIAL-MICRO]  77.71,81.36 0 top
FD36  FIDUCIALUFIDUCIAL  [FIDUCIAL-MICRO]  77.71,81.36 0 bottom
FD37  FIDUCIALUFIDUCIAL  [FIDUCIAL-MICRO]  121.79,140.59 0 top
FD38  FIDUCIALUFIDUCIAL  [FIDUCIAL-MICRO]  121.79,140.59 0 bottom
FD39  FIDUCIALUFIDUCIAL  [FIDUCIAL-MICRO]  101.07,81.36 0 top
FD40  FIDUCIALUFIDUCIAL  [FIDUCIAL-MICRO]  101.07,81.36 0 bottom
GPIO18PU  [SMT-JUMPER_2_NO_SILK]  23.01,42.67 0 bottom
GPIO18PU1  [SMT-JUMPER_2_NO_SILK]  46.38,42.67 0 bottom
GPIO18PU2  [SMT-JUMPER_2_NO_SILK]  69.75,42.67 0 bottom
GPIO18PU3  [SMT-JUMPER_2_NO_SILK]  93.12,42.67 0 bottom
GPIO18PU4  [SMT-JUMPER_2_NO_SILK]  116.48,42.67 0 bottom
GPIO18PU5  [SMT-JUMPER_2_NO_SILK]  23.01,110.49 0 bottom
GPIO18PU6  [SMT-JUMPER_2_NO_SILK]  46.38,110.49 0 bottom
GPIO18PU7  [SMT-JUMPER_2_NO_SILK]  69.75,110.49 0 bottom
GPIO18PU8  [SMT-JUMPER_2_NO_SILK]  93.12,110.49 0 bottom
GPIO18PU9  [SMT-JUMPER_2_NO_SILK]  116.48,110.49 0 bottom
H1  STAND-OFF  [STAND-OFF]  9.4,11.94 0 top
H2  STAND-OFF  [STAND-OFF]  27.18,11.94 0 top
H3  STAND-OFF  [STAND-OFF]  32.77,11.94 0 top
H4  STAND-OFF  [STAND-OFF]  50.55,11.94 0 top
H5  STAND-OFF  [STAND-OFF]  56.13,11.94 0 top
H6  STAND-OFF  [STAND-OFF]  73.91,11.94 0 top
H7  STAND-OFF  [STAND-OFF]  79.5,11.94 0 top
H8  STAND-OFF  [STAND-OFF]  97.28,11.94 0 top
H9  STAND-OFF  [STAND-OFF]  102.87,11.94 0 top
H10  STAND-OFF  [STAND-OFF]  120.65,11.94 0 top
H11  STAND-OFF  [STAND-OFF]  9.4,79.76 0 top
H12  STAND-OFF  [STAND-OFF]  27.18,79.76 0 top
H13  STAND-OFF  [STAND-OFF]  32.77,79.76 0 top
H14  STAND-OFF  [STAND-OFF]  50.55,79.76 0 top
H15  STAND-OFF  [STAND-OFF]  56.13,79.76 0 top
H16  STAND-OFF  [STAND-OFF]  73.91,79.76 0 top
H17  STAND-OFF  [STAND-OFF]  79.5,79.76 0 top
H18  STAND-OFF  [STAND-OFF]  97.28,79.76 0 top
H19  STAND-OFF  [STAND-OFF]  102.87,79.76 0 top
H20  STAND-OFF  [STAND-OFF]  120.65,79.76 0 top
J1  QWIIC_RA  [JST04_1MM_RA]  35.31,18.8 270 top
J2  [1X12_SM_SQ_NOSILK]  8.13,33.53 90 top
J3  QWIIC_RA  [JST04_1MM_RA]  11.94,18.8 270 top
J4  [1X16_SM_SQ_NOSILK]  28.45,23.37 90 top
J5  USB-C  [USB-C-16P-4LAYER-ISOLATED]  18.29,16 0 top
J6  JTAG  [2X5-PTH-1.27MM-NO_SILK]  24.19,38.06 90 top
J7  [2X4_SMT_NO_POSTS_NS]  15.75,51.31 180 bottom
J8  [1X12_SM_SQ_NOSILK]  31.5,33.53 90 top
J9  [1X16_SM_SQ_NOSILK]  51.82,23.37 90 top
J10  USB-C  [USB-C-16P-4LAYER-ISOLATED]  41.66,16 0 top
J11  JTAG  [2X5-PTH-1.27MM-NO_SILK]  47.56,38.06 90 top
J12  [2X4_SMT_NO_POSTS_NS]  39.12,51.31 180 bottom
J13  QWIIC_RA  [JST04_1MM_RA]  58.67,18.8 270 top
J14  [1X12_SM_SQ_NOSILK]  54.86,33.53 90 top
J15  [1X16_SM_SQ_NOSILK]  75.18,23.37 90 top
J16  USB-C  [USB-C-16P-4LAYER-ISOLATED]  65.02,16 0 top
J17  JTAG  [2X5-PTH-1.27MM-NO_SILK]  70.93,38.06 90 top
J18  [2X4_SMT_NO_POSTS_NS]  62.48,51.31 180 bottom
J19  QWIIC_RA  [JST04_1MM_RA]  82.04,18.8 270 top
J20  [1X12_SM_SQ_NOSILK]  78.23,33.53 90 top
J21  [1X16_SM_SQ_NOSILK]  98.55,23.37 90 top
J22  USB-C  [USB-C-16P-4LAYER-ISOLATED]  88.39,16 0 top
J23  JTAG  [2X5-PTH-1.27MM-NO_SILK]  94.29,38.06 90 top
J24  [2X4_SMT_NO_POSTS_NS]  85.85,51.31 180 bottom
J25  QWIIC_RA  [JST04_1MM_RA]  105.41,18.8 270 top
J26  [1X12_SM_SQ_NOSILK]  101.6,33.53 90 top
J27  [1X16_SM_SQ_NOSILK]  121.92,23.37 90 top
J28  USB-C  [USB-C-16P-4LAYER-ISOLATED]  111.76,16 0 top
J29  JTAG  [2X5-PTH-1.27MM-NO_SILK]  117.66,38.06 90 top
J30  [2X4_SMT_NO_POSTS_NS]  109.22,51.31 180 bottom
J31  QWIIC_RA  [JST04_1MM_RA]  11.94,86.61 270 top
J32  [1X12_SM_SQ_NOSILK]  8.13,101.35 90 top
J33  [1X16_SM_SQ_NOSILK]  28.45,91.19 90 top
J34  USB-C  [USB-C-16P-4LAYER-ISOLATED]  18.29,83.82 0 top
J35  JTAG  [2X5-PTH-1.27MM-NO_SILK]  24.19,105.87 90 top
J36  [2X4_SMT_NO_POSTS_NS]  15.75,119.13 180 bottom
J37  QWIIC_RA  [JST04_1MM_RA]  35.31,86.61 270 top
J38  [1X12_SM_SQ_NOSILK]  31.5,101.35 90 top
J39  [1X16_SM_SQ_NOSILK]  51.82,91.19 90 top
J40  USB-C  [USB-C-16P-4LAYER-ISOLATED]  41.66,83.82 0 top
J41  JTAG  [2X5-PTH-1.27MM-NO_SILK]  47.56,105.87 90 top
J42  [2X4_SMT_NO_POSTS_NS]  39.12,119.13 180 bottom
J43  QWIIC_RA  [JST04_1MM_RA]  58.67,86.61 270 top
J44  [1X12_SM_SQ_NOSILK]  54.86,101.35 90 top
J45  [1X16_SM_SQ_NOSILK]  75.18,91.19 90 top
J46  USB-C  [USB-C-16P-4LAYER-ISOLATED]  65.02,83.82 0 top
J47  JTAG  [2X5-PTH-1.27MM-NO_SILK]  70.93,105.87 90 top
J48  [2X4_SMT_NO_POSTS_NS]  62.48,119.13 180 bottom
J49  QWIIC_RA  [JST04_1MM_RA]  82.04,86.61 270 top
J50  [1X12_SM_SQ_NOSILK]  78.23,101.35 90 top
J51  [1X16_SM_SQ_NOSILK]  98.55,91.19 90 top
J52  USB-C  [USB-C-16P-4LAYER-ISOLATED]  88.39,83.82 0 top
J53  JTAG  [2X5-PTH-1.27MM-NO_SILK]  94.29,105.87 90 top
J54  [2X4_SMT_NO_POSTS_NS]  85.85,119.13 180 bottom
J55  QWIIC_RA  [JST04_1MM_RA]  105.41,86.61 270 top
J56  [1X12_SM_SQ_NOSILK]  101.6,101.35 90 top
J57  [1X16_SM_SQ_NOSILK]  121.92,91.19 90 top
J58  USB-C  [USB-C-16P-4LAYER-ISOLATED]  111.76,83.82 0 top
J59  JTAG  [2X5-PTH-1.27MM-NO_SILK]  117.66,105.87 90 top
J60  [2X4_SMT_NO_POSTS_NS]  109.22,119.13 180 bottom
JP1  LiPo  [JST-2-SMD]  33.71,27.18 90 top
JP2  LiPo  [JST-2-SMD]  10.34,27.18 90 top
JP3  LiPo  [JST-2-SMD]  57.07,27.18 90 top
JP4  LiPo  [JST-2-SMD]  80.44,27.18 90 top
JP5  LiPo  [JST-2-SMD]  103.81,27.18 90 top
JP6  LiPo  [JST-2-SMD]  10.34,95 90 top
JP7  LiPo  [JST-2-SMD]  33.71,95 90 top
JP8  LiPo  [JST-2-SMD]  57.07,95 90 top
JP9  LiPo  [JST-2-SMD]  80.44,95 90 top
JP10  LiPo  [JST-2-SMD]  103.81,95 90 top
LOGO1  SFE_LOGO_FLAME.1_INCH  [SFE_LOGO_FLAME_.1]  22,33.46 0 top
LOGO2  OSHW-LOGOMINI  [OSHW-LOGO-MINI]  18.29,13.21 0 bottom
LOGO3  SFE_LOGO_NAME_FLAME.1_INCH  [SFE_LOGO_NAME_FLAME_.1]  18.42,69.47 0 bottom
LOGO4  FOUR_LAYER_WARNING  [FOUR_LAYER_WARNING]  37.34,48.77 0 top
LOGO5  OSHW-LOGOMINI  [OSHW-LOGO-MINI]  41.66,13.21 0 bottom
LOGO6  QWIIC_LOGO_4MM  [QWIIC_4MM]  11.36,15.07 0 top
LOGO7  SFE_LOGO_NAME_FLAME.1_INCH  [SFE_LOGO_NAME_FLAME_.1]  41.79,69.47 0 bottom
LOGO8  FOUR_LAYER_WARNING  [FOUR_LAYER_WARNING]  60.71,48.77 0 top
LOGO9  QWIIC_LOGO_4MM  [QWIIC_4MM]  34.73,15.07 0 top
LOGO10  SFE_LOGO_FLAME.1_INCH  [SFE_LOGO_FLAME_.1]  45.37,33.46 0 top
LOGO11  OSHW-LOGOMINI  [OSHW-LOGO-MINI]  65.02,13.21 0 bottom
LOGO12  SFE_LOGO_NAME_FLAME.1_INCH  [SFE_LOGO_NAME_FLAME_.1]  65.16,69.47 0 bottom
LOGO13  FOUR_LAYER_WARNING  [FOUR_LAYER_WARNING]  84.07,48.77 0 top
LOGO14  QWIIC_LOGO_4MM  [QWIIC_4MM]  58.1,15.07 0 top
LOGO15  SFE_LOGO_FLAME.1_INCH  [SFE_LOGO_FLAME_.1]  68.74,33.46 0 top
LOGO16  OSHW-LOGOMINI  [OSHW-LOGO-MINI]  88.39,13.21 0 bottom
LOGO17  SFE_LOGO_NAME_FLAME.1_INCH  [SFE_LOGO_NAME_FLAME_.1]  88.53,69.47 0 bottom
LOGO18  FOUR_LAYER_WARNING  [FOUR_LAYER_WARNING]  107.44,48.77 0 top
LOGO19  QWIIC_LOGO_4MM  [QWIIC_4MM]  81.47,15.07 0 top
LOGO20  SFE_LOGO_FLAME.1_INCH  [SFE_LOGO_FLAME_.1]  92.11,33.46 0 top
LOGO21  OSHW-LOGOMINI  [OSHW-LOGO-MINI]  111.76,13.21 0 bottom
LOGO22  SFE_LOGO_NAME_FLAME.1_INCH  [SFE_LOGO_NAME_FLAME_.1]  111.89,69.47 0 bottom
LOGO23  FOUR_LAYER_WARNING  [FOUR_LAYER_WARNING]  130.81,48.77 0 top
LOGO24  QWIIC_LOGO_4MM  [QWIIC_4MM]  104.83,15.07 0 top
LOGO25  SFE_LOGO_FLAME.1_INCH  [SFE_LOGO_FLAME_.1]  115.48,33.46 0 top
LOGO26  OSHW-LOGOMINI  [OSHW-LOGO-MINI]  18.29,81.03 0 bottom
LOGO27  SFE_LOGO_NAME_FLAME.1_INCH  [SFE_LOGO_NAME_FLAME_.1]  18.42,137.29 0 bottom
LOGO28  FOUR_LAYER_WARNING  [FOUR_LAYER_WARNING]  37.34,116.59 0 top
LOGO29  QWIIC_LOGO_4MM  [QWIIC_4MM]  11.36,82.89 0 top
LOGO30  SFE_LOGO_FLAME.1_INCH  [SFE_LOGO_FLAME_.1]  22,101.28 0 top
LOGO31  OSHW-LOGOMINI  [OSHW-LOGO-MINI]  41.66,81.03 0 bottom
LOGO32  SFE_LOGO_NAME_FLAME.1_INCH  [SFE_LOGO_NAME_FLAME_.1]  41.79,137.29 0 bottom
LOGO33  FOUR_LAYER_WARNING  [FOUR_LAYER_WARNING]  60.71,116.59 0 top
LOGO34  QWIIC_LOGO_4MM  [QWIIC_4MM]  34.73,82.89 0 top
LOGO35  SFE_LOGO_FLAME.1_INCH  [SFE_LOGO_FLAME_.1]  45.37,101.28 0 top
LOGO36  OSHW-LOGOMINI  [OSHW-LOGO-MINI]  65.02,81.03 0 bottom
LOGO37  SFE_LOGO_NAME_FLAME.1_INCH  [SFE_LOGO_NAME_FLAME_.1]  65.16,137.29 0 bottom
LOGO38  FOUR_LAYER_WARNING  [FOUR_LAYER_WARNING]  84.07,116.59 0 top
LOGO39  QWIIC_LOGO_4MM  [QWIIC_4MM]  58.1,82.89 0 top
LOGO40  SFE_LOGO_FLAME.1_INCH  [SFE_LOGO_FLAME_.1]  68.74,101.28 0 top
LOGO41  OSHW-LOGOMINI  [OSHW-LOGO-MINI]  88.39,81.03 0 bottom
LOGO42  SFE_LOGO_NAME_FLAME.1_INCH  [SFE_LOGO_NAME_FLAME_.1]  88.53,137.29 0 bottom
LOGO43  FOUR_LAYER_WARNING  [FOUR_LAYER_WARNING]  107.44,116.59 0 top
LOGO44  QWIIC_LOGO_4MM  [QWIIC_4MM]  81.47,82.89 0 top
LOGO45  SFE_LOGO_FLAME.1_INCH  [SFE_LOGO_FLAME_.1]  92.11,101.28 0 top
LOGO46  OSHW-LOGOMINI  [OSHW-LOGO-MINI]  111.76,81.03 0 bottom
LOGO47  SFE_LOGO_NAME_FLAME.1_INCH  [SFE_LOGO_NAME_FLAME_.1]  111.89,137.29 0 bottom
LOGO48  FOUR_LAYER_WARNING  [FOUR_LAYER_WARNING]  130.81,116.59 0 top
LOGO49  QWIIC_LOGO_4MM  [QWIIC_4MM]  104.83,82.89 0 top
LOGO50  SFE_LOGO_FLAME.1_INCH  [SFE_LOGO_FLAME_.1]  115.48,101.28 0 top
Q1  2.5A/30V  [SOT23-3@1]  18.92,30.35 90 top
Q2  MBT3904DW1T1  [SC70-6]  23.14,30.5 270 top
Q3  2.5A/30V  [SOT23-3@1]  42.29,30.35 90 top
Q4  MBT3904DW1T1  [SC70-6]  46.51,30.5 270 top
Q5  2.5A/30V  [SOT23-3@1]  65.66,30.35 90 top
Q6  MBT3904DW1T1  [SC70-6]  69.88,30.5 270 top
Q7  2.5A/30V  [SOT23-3@1]  89.03,30.35 90 top
Q8  MBT3904DW1T1  [SC70-6]  93.25,30.5 270 top
Q9  2.5A/30V  [SOT23-3@1]  112.4,30.35 90 top
Q10  MBT3904DW1T1  [SC70-6]  116.61,30.5 270 top
Q11  2.5A/30V  [SOT23-3@1]  18.92,98.17 90 top
Q12  MBT3904DW1T1  [SC70-6]  23.14,98.32 270 top
Q13  2.5A/30V  [SOT23-3@1]  42.29,98.17 90 top
Q14  MBT3904DW1T1  [SC70-6]  46.51,98.32 270 top
Q15  2.5A/30V  [SOT23-3@1]  65.66,98.17 90 top
Q16  MBT3904DW1T1  [SC70-6]  69.88,98.32 270 top
Q17  2.5A/30V  [SOT23-3@1]  89.03,98.17 90 top
Q18  MBT3904DW1T1  [SC70-6]  93.25,98.32 270 top
Q19  2.5A/30V  [SOT23-3@1]  112.4,98.17 90 top
Q20  MBT3904DW1T1  [SC70-6]  116.61,98.32 270 top
R1  10k  [0402-TIGHT]  25.84,29.25 180 top
R2  10k  [0402-TIGHT]  16.31,23.49 90 top
R3  1k  [0402-TIGHT]  26.24,16.05 0 top
R4  1k  [0402-TIGHT]  10.6,39.46 270 top
R5  22k  [0402-TIGHT]  26.69,22.41 90 top
R6  2.0k  [0603]  17.15,34.23 180 top
R7  10k  [0402-TIGHT]  18.74,27.47 90 top
R8  100k  [0402-TIGHT]  9.98,33.91 270 top
R9  33k  [0402-TIGHT]  27.2,20.75 180 top
R10  10k  [0402-TIGHT]  28.83,63.75 270 top
R11  5.1k  [0402-TIGHT]  21.03,18.08 270 top
R12  5.1k  [0402-TIGHT]  17.39,23.49 270 top
R13  10k  [0402-TIGHT]  17.12,32.54 0 top
R14  10k  [0402-TIGHT]  26.26,36.09 270 top
R15  10k  [0402-TIGHT]  42.11,27.47 90 top
R16  1k  [0402-TIGHT]  49.61,16.05 0 top
R17  10k  [0402-TIGHT]  25.4,31.75 270 top
R18  10k  [0402-TIGHT]  26.62,31.75 90 top
R19  2.0k  [0603]  40.52,34.23 180 top
R20  10k  [0402-TIGHT]  48.77,31.75 270 top
R21  10k  [0402-TIGHT]  49.99,31.75 90 top
R22  10k  [0402-TIGHT]  49.21,29.25 180 top
R23  1k  [0402-TIGHT]  33.97,39.46 270 top
R24  100k  [0402-TIGHT]  33.35,33.91 270 top
R25  22k  [0402-TIGHT]  50.06,22.41 90 top
R26  33k  [0402-TIGHT]  50.56,20.75 180 top
R27  10k  [0402-TIGHT]  52.2,63.75 270 top
R28  10k  [0402-TIGHT]  39.67,23.49 90 top
R29  5.1k  [0402-TIGHT]  44.4,18.08 270 top
R30  5.1k  [0402-TIGHT]  40.76,23.49 270 top
R31  10k  [0402-TIGHT]  40.49,32.54 0 top
R32  10k  [0402-TIGHT]  49.63,36.09 270 top
R33  10k  [0402-TIGHT]  65.48,27.47 90 top
R34  1k  [0402-TIGHT]  72.97,16.05 0 top
R35  2.0k  [0603]  63.89,34.23 180 top
R36  10k  [0402-TIGHT]  72.14,31.75 270 top
R37  10k  [0402-TIGHT]  73.36,31.75 90 top
R38  10k  [0402-TIGHT]  72.58,29.25 180 top
R39  1k  [0402-TIGHT]  57.34,39.46 270 top
R40  100k  [0402-TIGHT]  56.72,33.91 270 top
R41  22k  [0402-TIGHT]  73.43,22.41 90 top
R42  33k  [0402-TIGHT]  73.93,20.75 180 top
R43  10k  [0402-TIGHT]  75.57,63.75 270 top
R44  10k  [0402-TIGHT]  63.04,23.49 90 top
R45  5.1k  [0402-TIGHT]  67.77,18.08 270 top
R46  5.1k  [0402-TIGHT]  64.13,23.49 270 top
R47  10k  [0402-TIGHT]  63.86,32.54 0 top
R48  10k  [0402-TIGHT]  73,36.09 270 top
R49  10k  [0402-TIGHT]  88.84,27.47 90 top
R50  1k  [0402-TIGHT]  96.34,16.05 0 top
R51  2.0k  [0603]  87.26,34.23 180 top
R52  10k  [0402-TIGHT]  95.5,31.75 270 top
R53  10k  [0402-TIGHT]  96.72,31.75 90 top
R54  10k  [0402-TIGHT]  95.94,29.25 180 top
R55  1k  [0402-TIGHT]  80.71,39.46 270 top
R56  100k  [0402-TIGHT]  80.09,33.91 270 top
R57  22k  [0402-TIGHT]  96.79,22.41 90 top
R58  33k  [0402-TIGHT]  97.3,20.75 180 top
R59  10k  [0402-TIGHT]  98.94,63.75 270 top
R60  10k  [0402-TIGHT]  86.41,23.49 90 top
R61  5.1k  [0402-TIGHT]  91.14,18.08 270 top
R62  5.1k  [0402-TIGHT]  87.5,23.49 270 top
R63  10k  [0402-TIGHT]  87.22,32.54 0 top
R64  10k  [0402-TIGHT]  96.37,36.09 270 top
R65  10k  [0402-TIGHT]  112.21,27.47 90 top
R66  1k  [0402-TIGHT]  119.71,16.05 0 top
R67  2.0k  [0603]  110.62,34.23 180 top
R68  10k  [0402-TIGHT]  118.87,31.75 270 top
R69  10k  [0402-TIGHT]  120.09,31.75 90 top
R70  10k  [0402-TIGHT]  119.31,29.25 180 top
R71  1k  [0402-TIGHT]  104.08,39.46 270 top
R72  100k  [0402-TIGHT]  103.45,33.91 270 top
R73  22k  [0402-TIGHT]  120.16,22.41 90 top
R74  33k  [0402-TIGHT]  120.67,20.75 180 top
R75  10k  [0402-TIGHT]  122.3,63.75 270 top
R76  10k  [0402-TIGHT]  109.78,23.49 90 top
R77  5.1k  [0402-TIGHT]  114.5,18.08 270 top
R78  5.1k  [0402-TIGHT]  110.86,23.49 270 top
R79  10k  [0402-TIGHT]  110.59,32.54 0 top
R80  10k  [0402-TIGHT]  119.74,36.09 270 top
R81  10k  [0402-TIGHT]  18.74,95.29 90 top
R82  1k  [0402-TIGHT]  26.24,83.87 0 top
R83  2.0k  [0603]  17.15,102.05 180 top
R84  10k  [0402-TIGHT]  25.4,99.57 270 top
R85  10k  [0402-TIGHT]  26.62,99.57 90 top
R86  10k  [0402-TIGHT]  25.84,97.07 180 top
R87  1k  [0402-TIGHT]  10.6,107.28 270 top
R88  100k  [0402-TIGHT]  9.98,101.73 270 top
R89  22k  [0402-TIGHT]  26.69,90.23 90 top
R90  33k  [0402-TIGHT]  27.2,88.56 180 top
R91  10k  [0402-TIGHT]  28.83,131.57 270 top
R92  10k  [0402-TIGHT]  16.31,91.31 90 top
R93  5.1k  [0402-TIGHT]  21.03,85.9 270 top
R94  5.1k  [0402-TIGHT]  17.39,91.31 270 top
R95  10k  [0402-TIGHT]  17.12,100.36 0 top
R96  10k  [0402-TIGHT]  26.26,103.91 270 top
R97  10k  [0402-TIGHT]  42.11,95.29 90 top
R98  1k  [0402-TIGHT]  49.61,83.87 0 top
R99  2.0k  [0603]  40.52,102.05 180 top
R100  10k  [0402-TIGHT]  48.77,99.57 270 top
R101  10k  [0402-TIGHT]  49.99,99.57 90 top
R102  10k  [0402-TIGHT]  49.21,97.07 180 top
R103  1k  [0402-TIGHT]  33.97,107.28 270 top
R104  100k  [0402-TIGHT]  33.35,101.73 270 top
R105  22k  [0402-TIGHT]  50.06,90.23 90 top
R106  33k  [0402-TIGHT]  50.56,88.56 180 top
R107  10k  [0402-TIGHT]  52.2,131.57 270 top
R108  10k  [0402-TIGHT]  39.67,91.31 90 top
R109  5.1k  [0402-TIGHT]  44.4,85.9 270 top
R110  5.1k  [0402-TIGHT]  40.76,91.31 270 top
R111  10k  [0402-TIGHT]  40.49,100.36 0 top
R112  10k  [0402-TIGHT]  49.63,103.91 270 top
R113  10k  [0402-TIGHT]  65.48,95.29 90 top
R114  1k  [0402-TIGHT]  72.97,83.87 0 top
R115  2.0k  [0603]  63.89,102.05 180 top
R116  10k  [0402-TIGHT]  72.14,99.57 270 top
R117  10k  [0402-TIGHT]  73.36,99.57 90 top
R118  10k  [0402-TIGHT]  72.58,97.07 180 top
R119  1k  [0402-TIGHT]  57.34,107.28 270 top
R120  100k  [0402-TIGHT]  56.72,101.73 270 top
R121  22k  [0402-TIGHT]  73.43,90.23 90 top
R122  33k  [0402-TIGHT]  73.93,88.56 180 top
R123  10k  [0402-TIGHT]  75.57,131.57 270 top
R124  10k  [0402-TIGHT]  63.04,91.31 90 top
R125  5.1k  [0402-TIGHT]  67.77,85.9 270 top
R126  5.1k  [0402-TIGHT]  64.13,91.31 270 top
R127  10k  [0402-TIGHT]  63.86,100.36 0 top
R128  10k  [0402-TIGHT]  73,103.91 270 top
R129  10k  [0402-TIGHT]  88.84,95.29 90 top
R130  1k  [0402-TIGHT]  96.34,83.87 0 top
R131  2.0k  [0603]  87.26,102.05 180 top
R132  10k  [0402-TIGHT]  95.5,99.57 270 top
R133  10k  [0402-TIGHT]  96.72,99.57 90 top
R134  10k  [0402-TIGHT]  95.94,97.07 180 top
R135  1k  [0402-TIGHT]  80.71,107.28 270 top
R136  100k  [0402-TIGHT]  80.09,101.73 270 top
R137  22k  [0402-TIGHT]  96.79,90.23 90 top
R138  33k  [0402-TIGHT]  97.3,88.56 180 top
R139  10k  [0402-TIGHT]  98.94,131.57 270 top
R140  10k  [0402-TIGHT]  86.41,91.31 90 top
R141  5.1k  [0402-TIGHT]  91.14,85.9 270 top
R142  5.1k  [0402-TIGHT]  87.5,91.31 270 top
R143  10k  [0402-TIGHT]  87.22,100.36 0 top
R144  10k  [0402-TIGHT]  96.37,103.91 270 top
R145  10k  [0402-TIGHT]  112.21,95.29 90 top
R146  1k  [0402-TIGHT]  119.71,83.87 0 top
R147  2.0k  [0603]  110.62,102.05 180 top
R148  10k  [0402-TIGHT]  118.87,99.57 270 top
R149  10k  [0402-TIGHT]  120.09,99.57 90 top
R150  10k  [0402-TIGHT]  119.31,97.07 180 top
R151  1k  [0402-TIGHT]  104.08,107.28 270 top
R152  100k  [0402-TIGHT]  103.45,101.73 270 top
R153  22k  [0402-TIGHT]  120.16,90.23 90 top
R154  33k  [0402-TIGHT]  120.67,88.56 180 top
R155  10k  [0402-TIGHT]  122.3,131.57 270 top
R156  10k  [0402-TIGHT]  109.78,91.31 90 top
R157  5.1k  [0402-TIGHT]  114.5,85.9 270 top
R158  5.1k  [0402-TIGHT]  110.86,91.31 270 top
R159  10k  [0402-TIGHT]  110.59,100.36 0 top
R160  10k  [0402-TIGHT]  119.74,103.91 270 top
S1  RESET  [TACTILE_SWITCH_SMD_4.6X2.8MM]  23.57,19.81 270 top
S2  0  [TACTILE_SWITCH_SMD_4.6X2.8MM]  14.64,19.81 270 top
S3  RESET  [TACTILE_SWITCH_SMD_4.6X2.8MM]  46.94,19.81 270 top
S4  0  [TACTILE_SWITCH_SMD_4.6X2.8MM]  38.01,19.81 270 top
S5  RESET  [TACTILE_SWITCH_SMD_4.6X2.8MM]  70.31,19.81 270 top
S6  0  [TACTILE_SWITCH_SMD_4.6X2.8MM]  61.37,19.81 270 top
S7  RESET  [TACTILE_SWITCH_SMD_4.6X2.8MM]  93.68,19.81 270 top
S8  0  [TACTILE_SWITCH_SMD_4.6X2.8MM]  84.74,19.81 270 top
S9  RESET  [TACTILE_SWITCH_SMD_4.6X2.8MM]  117.04,19.81 270 top
S10  0  [TACTILE_SWITCH_SMD_4.6X2.8MM]  108.11,19.81 270 top
S11  RESET  [TACTILE_SWITCH_SMD_4.6X2.8MM]  23.57,87.63 270 top
S12  0  [TACTILE_SWITCH_SMD_4.6X2.8MM]  14.64,87.63 270 top
S13  RESET  [TACTILE_SWITCH_SMD_4.6X2.8MM]  46.94,87.63 270 top
S14  0  [TACTILE_SWITCH_SMD_4.6X2.8MM]  38.01,87.63 270 top
S15  RESET  [TACTILE_SWITCH_SMD_4.6X2.8MM]  70.31,87.63 270 top
S16  0  [TACTILE_SWITCH_SMD_4.6X2.8MM]  61.37,87.63 270 top
S17  RESET  [TACTILE_SWITCH_SMD_4.6X2.8MM]  93.68,87.63 270 top
S18  0  [TACTILE_SWITCH_SMD_4.6X2.8MM]  84.74,87.63 270 top
S19  RESET  [TACTILE_SWITCH_SMD_4.6X2.8MM]  117.04,87.63 270 top
S20  0  [TACTILE_SWITCH_SMD_4.6X2.8MM]  108.11,87.63 270 top
TP1  [TP_15TH]  24.64,33.53 0 top
TP2  [PAD.03X.04]  20.83,57.66 0 bottom
TP3  [PAD.03X.04]  21.46,55.12 0 bottom
TP4  [PAD.03X.04]  21.46,50.04 0 bottom
TP5  [PAD.03X.04]  20.83,60.2 0 bottom
TP6  [TP_15TH]  48.01,33.53 0 top
TP7  [PAD.03X.04]  44.83,55.12 0 bottom
TP8  [PAD.03X.04]  44.83,50.04 0 bottom
TP9  [PAD.03X.04]  44.2,60.2 0 bottom
TP10  [PAD.03X.04]  44.2,57.66 0 bottom
TP11  [TP_15TH]  71.37,33.53 0 top
TP12  [PAD.03X.04]  68.2,55.12 0 bottom
TP13  [PAD.03X.04]  68.2,50.04 0 bottom
TP14  [PAD.03X.04]  67.56,60.2 0 bottom
TP15  [PAD.03X.04]  67.56,57.66 0 bottom
TP16  [TP_15TH]  94.74,33.53 0 top
TP17  [PAD.03X.04]  91.57,55.12 0 bottom
TP18  [PAD.03X.04]  91.57,50.04 0 bottom
TP19  [PAD.03X.04]  90.93,60.2 0 bottom
TP20  [PAD.03X.04]  90.93,57.66 0 bottom
TP21  [TP_15TH]  118.11,33.53 0 top
TP22  [PAD.03X.04]  114.94,55.12 0 bottom
TP23  [PAD.03X.04]  114.94,50.04 0 bottom
TP24  [PAD.03X.04]  114.3,60.2 0 bottom
TP25  [PAD.03X.04]  114.3,57.66 0 bottom
TP26  [TP_15TH]  24.64,101.35 0 top
TP27  [PAD.03X.04]  21.46,122.94 0 bottom
TP28  [PAD.03X.04]  21.46,117.86 0 bottom
TP29  [PAD.03X.04]  20.83,128.02 0 bottom
TP30  [PAD.03X.04]  20.83,125.48 0 bottom
TP31  [TP_15TH]  48.01,101.35 0 top
TP32  [PAD.03X.04]  44.83,122.94 0 bottom
TP33  [PAD.03X.04]  44.83,117.86 0 bottom
TP34  [PAD.03X.04]  44.2,128.02 0 bottom
TP35  [PAD.03X.04]  44.2,125.48 0 bottom
TP36  [TP_15TH]  71.37,101.35 0 top
TP37  [PAD.03X.04]  68.2,122.94 0 bottom
TP38  [PAD.03X.04]  68.2,117.86 0 bottom
TP39  [PAD.03X.04]  67.56,128.02 0 bottom
TP40  [PAD.03X.04]  67.56,125.48 0 bottom
TP41  [TP_15TH]  94.74,101.35 0 top
TP42  [PAD.03X.04]  91.57,122.94 0 bottom
TP43  [PAD.03X.04]  91.57,117.86 0 bottom
TP44  [PAD.03X.04]  90.93,128.02 0 bottom
TP45  [PAD.03X.04]  90.93,125.48 0 bottom
TP46  [TP_15TH]  118.11,101.35 0 top
TP47  [PAD.03X.04]  114.94,122.94 0 bottom
TP48  [PAD.03X.04]  114.94,117.86 0 bottom
TP49  [PAD.03X.04]  114.3,128.02 0 bottom
TP50  [PAD.03X.04]  114.3,125.48 0 bottom
U1  ESP32-S2-WROOM  [ESP32-S2-WROOM]  18.29,54.48 90 top
U2  CP210X  [QFN24]  23,25.81 0 top
U3  AP2112  [SOT23-5]  12.73,34.14 270 top
U4  MCP73831  [SOT23-5]  19.56,36.7 90 top
U5  TC7USB40MU  [UQFN10]  18.29,18.29 0 top
U6  MCP73831  [SOT23-5]  42.93,36.7 90 top
U7  AP2112  [SOT23-5]  36.09,34.14 270 top
U8  CP210X  [QFN24]  46.37,25.81 0 top
U9  ESP32-S2-WROOM  [ESP32-S2-WROOM]  41.66,54.48 90 top
U10  TC7USB40MU  [UQFN10]  41.66,18.29 0 top
U11  MCP73831  [SOT23-5]  66.29,36.7 90 top
U12  AP2112  [SOT23-5]  59.46,34.14 270 top
U13  CP210X  [QFN24]  69.73,25.81 0 top
U14  ESP32-S2-WROOM  [ESP32-S2-WROOM]  65.02,54.48 90 top
U15  TC7USB40MU  [UQFN10]  65.02,18.29 0 top
U16  MCP73831  [SOT23-5]  89.66,36.7 90 top
U17  AP2112  [SOT23-5]  82.83,34.14 270 top
U18  CP210X  [QFN24]  93.1,25.81 0 top
U19  ESP32-S2-WROOM  [ESP32-S2-WROOM]  88.39,54.48 90 top
U20  TC7USB40MU  [UQFN10]  88.39,18.29 0 top
U21  MCP73831  [SOT23-5]  113.03,36.7 90 top
U22  AP2112  [SOT23-5]  106.2,34.14 270 top
U23  CP210X  [QFN24]  116.47,25.81 0 top
U24  ESP32-S2-WROOM  [ESP32-S2-WROOM]  111.76,54.48 90 top
U25  TC7USB40MU  [UQFN10]  111.76,18.29 0 top
U26  MCP73831  [SOT23-5]  19.56,104.52 90 top
U27  AP2112  [SOT23-5]  12.73,101.96 270 top
U28  CP210X  [QFN24]  23,93.63 0 top
U29  ESP32-S2-WROOM  [ESP32-S2-WROOM]  18.29,122.3 90 top
U30  TC7USB40MU  [UQFN10]  18.29,86.11 0 top
U31  MCP73831  [SOT23-5]  42.93,104.52 90 top
U32  AP2112  [SOT23-5]  36.09,101.96 270 top
U33  CP210X  [QFN24]  46.37,93.63 0 top
U34  ESP32-S2-WROOM  [ESP32-S2-WROOM]  41.66,122.3 90 top
U35  TC7USB40MU  [UQFN10]  41.66,86.11 0 top
U36  MCP73831  [SOT23-5]  66.29,104.52 90 top
U37  AP2112  [SOT23-5]  59.46,101.96 270 top
U38  CP210X  [QFN24]  69.73,93.63 0 top
U39  ESP32-S2-WROOM  [ESP32-S2-WROOM]  65.02,122.3 90 top
U40  TC7USB40MU  [UQFN10]  65.02,86.11 0 top
U41  MCP73831  [SOT23-5]  89.66,104.52 90 top
U42  AP2112  [SOT23-5]  82.83,101.96 270 top
U43  CP210X  [QFN24]  93.1,93.63 0 top
U44  ESP32-S2-WROOM  [ESP32-S2-WROOM]  88.39,122.3 90 top
U45  TC7USB40MU  [UQFN10]  88.39,86.11 0 top
U46  MCP73831  [SOT23-5]  113.03,104.52 90 top
U47  AP2112  [SOT23-5]  106.2,101.96 270 top
U48  CP210X  [QFN24]  116.47,93.63 0 top
U49  ESP32-S2-WROOM  [ESP32-S2-WROOM]  111.76,122.3 90 top
U50  TC7USB40MU  [UQFN10]  111.76,86.11 0 top
U$1  [#CP210X#0]  12.4,21.64 90 bottom
U$2  [SDI0]  28.47,52.58 0 top
U$3  [CHG0]  18.85,34.49 90 bottom
U$4  [#500#0]  15.89,33.14 90 bottom
U$5  [ESP32#S20]  18.17,67.06 0 bottom
U$6  [SDO0]  28.55,50.04 0 top
U$7  [#RST#0]  28.4,22 0 top
U$8  [#46#0]  11.93,54.95 90 bottom
U$9  [#ESP32#0]  12.47,24.36 90 bottom
U$10  [#45#0]  14.48,54.99 90 bottom
U$11  [MA0]  17.76,34.56 90 bottom
U$12  [#A5#0]  28.23,46.24 0 bottom
U$13  [ORDERING_INSTRUCTIONS]  59.44,60.2 0 top
U$14  [USB0]  14.19,23.14 90 bottom
U$15  [110]  8.13,44.96 0 top
U$16  [#GPIO18PU#0]  22.2,42.65 0 bottom
U$17  [100]  8.13,47.5 0 top
U$18  [80]  8.13,50.04 0 top
U$19  [#A4#0]  28.23,43.7 0 bottom
U$20  [60]  8.13,52.58 0 top
U$21  [#A2#0]  28.27,38.57 0 bottom
U$22  [#A3#0]  28.28,41.14 0 bottom
U$23  [40]  8.13,55.12 0 top
U$24  [330]  28.45,55.12 0 top
U$25  [SDA0]  8.13,60.2 0 top
U$26  [SCL0]  8.13,57.66 0 top
U$27  [SDA0]  31.5,60.2 0 top
U$28  [#A0#0]  28.23,33.54 0 bottom
U$29  [340]  28.45,57.66 0 top
U$30  [30]  28.45,60.2 0 top
U$31  [#36#SCK#0]  28.25,48.77 0 bottom
U$32  [#GND#0]  28.23,31 0 bottom
U$33  [#35#COPI#0]  28.25,51.31 0 bottom
U$34  [#37#CIPO#0]  28.25,53.85 0 bottom
U$35  [#33#RX1#0]  28.25,56.39 0 bottom
U$36  [#34#TX1#0]  28.25,58.93 0 bottom
U$37  [#3#0]  28.25,61.47 0 bottom
U$38  [#41#MTDI#0]  19.56,55.01 90 bottom
U$39  [#12#0]  8.36,43.69 0 bottom
U$40  [#13#0]  8.36,41.15 0 bottom
U$41  [#VUSB#0]  8.36,38.61 0 bottom
U$42  [#VBAT#0]  8.36,33.53 0 bottom
U$43  [#EN#0]  8.36,36.07 0 bottom
U$44  [#NC#0]  28.23,28.46 0 bottom
U$45  [#3V3#0]  28.23,25.92 0 bottom
U$46  [##RESET##0]  28.23,23.38 0 bottom
U$47  [#11#0]  8.33,46.22 0 bottom
U$48  [#6#0]  8.33,53.84 0 bottom
U$49  [#8#0]  8.33,51.3 0 bottom
U$50  [#10#0]  8.33,48.76 0 bottom
U$51  [#4#0]  8.33,56.38 0 bottom
U$52  [#1#SDA#0]  8.33,61.46 0 bottom
U$53  [#2#SCL#0]  8.33,58.92 0 bottom
U$54  [#21#0]  11.94,47.64 90 bottom
U$55  [#26#0]  14.48,47.62 90 bottom
U$56  [#TX0#0]  17.03,47.61 90 bottom
U$57  [#38#0]  19.56,47.6 90 bottom
U$58  [#RX0#0]  17.02,55.02 90 bottom
U$59  [ORDERING_INSTRUCTIONS]  36.07,60.2 0 top
U$60  [#100#0]  15.89,35.81 90 bottom
U$61  [THING_PLUS0]  18.16,65.4 0 bottom
U$62  [THING_PLUS_0]  19.34,40.18 0 top
U$63  [ESP32#S2_0]  19.34,41.39 0 top
U$64  [#A1#0]  28.22,36.08 0 bottom
U$65  [SCL0]  31.5,57.66 0 top
U$66  [120]  31.5,42.42 0 top
U$67  [130]  31.5,39.88 0 top
U$68  [130]  35.55,37.97 0 top
U$69  [VUSB0]  31.98,37.34 0 top
U$70  [EN0]  31.5,34.82 0 top
U$71  [VBAT0]  32.28,32.13 0 top
U$72  [120]  8.13,42.42 0 top
U$73  [130]  8.13,39.88 0 top
U$74  [130]  12.18,37.97 0 top
U$75  [VUSB0]  8.61,37.34 0 top
U$76  [EN0]  8.13,34.82 0 top
U$77  [VBAT0]  8.92,32.13 0 top
U$78  [CHG0]  28.75,18.36 90 top
U$79  [RESET0]  25.59,19.96 90 top
U$80  [CHG0]  52.12,18.36 90 top
U$81  [3V30]  28.45,24.64 0 top
U$82  [NC0]  28.45,27.18 0 top
U$83  [GND0]  28.45,29.72 0 top
U$84  [A00]  28.45,32.26 0 top
U$85  [A10]  28.45,34.8 0 top
U$86  [A20]  28.45,37.34 0 top
U$87  [A30]  28.45,39.88 0 top
U$88  [A40]  28.45,42.42 0 top
U$89  [A50]  28.45,44.96 0 top
U$90  [SCK0]  28.55,47.5 0 top
U$91  [RESET0]  48.96,19.96 90 top
U$92  [3V30]  51.82,24.64 0 top
U$93  [NC0]  51.82,27.18 0 top
U$94  [GND0]  51.82,29.72 0 top
U$95  [A00]  51.82,32.26 0 top
U$96  [00]  16.77,19.83 0 top
U$97  [A10]  51.82,34.8 0 top
U$98  [A20]  51.82,37.34 0 top
U$99  [A30]  51.82,39.88 0 top
U$100  [A40]  51.82,42.42 0 top
U$101  [A50]  51.82,44.96 0 top
U$102  [SCK0]  51.92,47.5 0 top
U$103  [00]  40.14,19.83 0 top
U$104  [#12#0]  31.72,43.69 0 bottom
U$105  [#13#0]  31.72,41.15 0 bottom
U$106  [#VUSB#0]  31.72,38.61 0 bottom
U$107  [#VBAT#0]  31.72,33.53 0 bottom
U$108  [#EN#0]  31.72,36.07 0 bottom
U$109  [#A5#0]  51.6,46.24 0 bottom
U$110  [#A4#0]  51.6,43.7 0 bottom
U$111  [#A0#0]  51.6,33.54 0 bottom
U$112  [#GND#0]  51.6,31 0 bottom
U$113  [#NC#0]  51.6,28.46 0 bottom
U$114  [#3V3#0]  51.6,25.92 0 bottom
U$115  [##RESET##0]  51.6,23.38 0 bottom
U$116  [SDI0]  51.84,52.58 0 top
U$117  [SDO0]  51.92,50.04 0 top
U$118  [#RST#0]  51.77,22 0 top
U$119  [USB0]  37.56,23.14 90 bottom
U$120  [110]  31.5,44.96 0 top
U$121  [100]  31.5,47.5 0 top
U$122  [80]  31.5,50.04 0 top
U$123  [60]  31.5,52.58 0 top
U$124  [40]  31.5,55.12 0 top
U$125  [330]  51.82,55.12 0 top
U$126  [340]  51.82,57.66 0 top
U$127  [30]  51.82,60.2 0 top
U$128  [#11#0]  31.7,46.22 0 bottom
U$129  [#8#0]  31.7,51.3 0 bottom
U$130  [#10#0]  31.7,48.76 0 bottom
U$131  [#6#0]  31.7,53.84 0 bottom
U$132  [#4#0]  31.7,56.38 0 bottom
U$133  [#1#SDA#0]  31.7,61.46 0 bottom
U$134  [#2#SCL#0]  31.7,58.92 0 bottom
U$135  [#36#SCK#0]  51.62,48.77 0 bottom
U$136  [#35#COPI#0]  51.62,51.31 0 bottom
U$137  [#37#CIPO#0]  51.62,53.85 0 bottom
U$138  [#33#RX1#0]  51.62,56.39 0 bottom
U$139  [#34#TX1#0]  51.62,58.93 0 bottom
U$140  [#3#0]  51.62,61.47 0 bottom
U$141  [CHG0]  42.22,34.49 90 bottom
U$142  [#46#0]  35.29,54.95 90 bottom
U$143  [#45#0]  37.85,54.99 90 bottom
U$144  [#41#MTDI#0]  42.93,55.01 90 bottom
U$145  [#21#0]  35.31,47.64 90 bottom
U$146  [#26#0]  37.85,47.62 90 bottom
U$147  [#TX0#0]  40.39,47.61 90 bottom
U$148  [#38#0]  42.93,47.6 90 bottom
U$149  [#RX0#0]  40.39,55.02 90 bottom
U$150  [MA0]  41.13,34.56 90 bottom
U$151  [#100#0]  39.26,35.81 90 bottom
U$152  [#500#0]  39.25,33.14 90 bottom
U$153  [ESP32#S20]  41.54,67.06 0 bottom
U$154  [THING_PLUS0]  41.53,65.4 0 bottom
U$155  [THING_PLUS_0]  42.71,40.18 0 top
U$156  [ESP32#S2_0]  42.71,41.39 0 top
U$157  [#A1#0]  51.58,36.08 0 bottom
U$158  [#A2#0]  51.64,38.57 0 bottom
U$159  [#A3#0]  51.65,41.14 0 bottom
U$160  [#CP210X#0]  35.76,21.64 90 bottom
U$161  [#ESP32#0]  35.84,24.36 90 bottom
U$162  [#GPIO18PU#0]  45.57,42.65 0 bottom
U$163  [ORDERING_INSTRUCTIONS]  82.8,60.2 0 top
U$164  [SDA0]  54.86,60.2 0 top
U$165  [SCL0]  54.86,57.66 0 top
U$166  [120]  54.86,42.42 0 top
U$167  [130]  54.86,39.88 0 top
U$168  [130]  58.92,37.97 0 top
U$169  [VUSB0]  55.35,37.34 0 top
U$170  [EN0]  54.86,34.82 0 top
U$171  [VBAT0]  55.65,32.13 0 top
U$172  [CHG0]  75.49,18.36 90 top
U$173  [RESET0]  72.33,19.96 90 top
U$174  [3V30]  75.18,24.64 0 top
U$175  [NC0]  75.18,27.18 0 top
U$176  [GND0]  75.18,29.72 0 top
U$177  [A00]  75.18,32.26 0 top
U$178  [A10]  75.18,34.8 0 top
U$179  [A20]  75.18,37.34 0 top
U$180  [A30]  75.18,39.88 0 top
U$181  [A40]  75.18,42.42 0 top
U$182  [A50]  75.18,44.96 0 top
U$183  [SCK0]  75.29,47.5 0 top
U$184  [00]  63.51,19.83 0 top
U$185  [#12#0]  55.09,43.69 0 bottom
U$186  [#13#0]  55.09,41.15 0 bottom
U$187  [#VUSB#0]  55.09,38.61 0 bottom
U$188  [#VBAT#0]  55.09,33.53 0 bottom
U$189  [#EN#0]  55.09,36.07 0 bottom
U$190  [#A5#0]  74.97,46.24 0 bottom
U$191  [#A4#0]  74.97,43.7 0 bottom
U$192  [#A0#0]  74.97,33.54 0 bottom
U$193  [#GND#0]  74.97,31 0 bottom
U$194  [#NC#0]  74.97,28.46 0 bottom
U$195  [#3V3#0]  74.97,25.92 0 bottom
U$196  [##RESET##0]  74.97,23.38 0 bottom
U$197  [SDI0]  75.21,52.58 0 top
U$198  [SDO0]  75.29,50.04 0 top
U$199  [#RST#0]  75.13,22 0 top
U$200  [USB0]  60.93,23.14 90 bottom
U$201  [110]  54.86,44.96 0 top
U$202  [100]  54.86,47.5 0 top
U$203  [80]  54.86,50.04 0 top
U$204  [60]  54.86,52.58 0 top
U$205  [40]  54.86,55.12 0 top
U$206  [330]  75.18,55.12 0 top
U$207  [340]  75.18,57.66 0 top
U$208  [30]  75.18,60.2 0 top
U$209  [#11#0]  55.07,46.22 0 bottom
U$210  [#8#0]  55.07,51.3 0 bottom
U$211  [#10#0]  55.07,48.76 0 bottom
U$212  [#6#0]  55.07,53.84 0 bottom
U$213  [#4#0]  55.07,56.38 0 bottom
U$214  [#1#SDA#0]  55.07,61.46 0 bottom
U$215  [#2#SCL#0]  55.07,58.92 0 bottom
U$216  [#36#SCK#0]  74.99,48.77 0 bottom
U$217  [#35#COPI#0]  74.99,51.31 0 bottom
U$218  [#37#CIPO#0]  74.99,53.85 0 bottom
U$219  [#33#RX1#0]  74.99,56.39 0 bottom
U$220  [#34#TX1#0]  74.99,58.93 0 bottom
U$221  [#3#0]  74.99,61.47 0 bottom
U$222  [CHG0]  65.59,34.49 90 bottom
U$223  [#46#0]  58.66,54.95 90 bottom
U$224  [#45#0]  61.22,54.99 90 bottom
U$225  [#41#MTDI#0]  66.3,55.01 90 bottom
U$226  [#21#0]  58.68,47.64 90 bottom
U$227  [#26#0]  61.21,47.62 90 bottom
U$228  [#TX0#0]  63.76,47.61 90 bottom
U$229  [#38#0]  66.29,47.6 90 bottom
U$230  [#RX0#0]  63.76,55.02 90 bottom
U$231  [MA0]  64.5,34.56 90 bottom
U$232  [#100#0]  62.62,35.81 90 bottom
U$233  [#500#0]  62.62,33.14 90 bottom
U$234  [ESP32#S20]  64.91,67.06 0 bottom
U$235  [THING_PLUS0]  64.89,65.4 0 bottom
U$236  [THING_PLUS_0]  66.07,40.18 0 top
U$237  [ESP32#S2_0]  66.08,41.39 0 top
U$238  [#A1#0]  74.95,36.08 0 bottom
U$239  [#A2#0]  75.01,38.57 0 bottom
U$240  [#A3#0]  75.02,41.14 0 bottom
U$241  [#CP210X#0]  59.13,21.64 90 bottom
U$242  [#ESP32#0]  59.21,24.36 90 bottom
U$243  [#GPIO18PU#0]  68.94,42.65 0 bottom
U$244  [ORDERING_INSTRUCTIONS]  106.17,60.2 0 top
U$245  [SDA0]  78.23,60.2 0 top
U$246  [SCL0]  78.23,57.66 0 top
U$247  [120]  78.23,42.42 0 top
U$248  [130]  78.23,39.88 0 top
U$249  [130]  82.29,37.97 0 top
U$250  [VUSB0]  78.71,37.34 0 top
U$251  [EN0]  78.23,34.82 0 top
U$252  [VBAT0]  79.02,32.13 0 top
U$253  [CHG0]  98.86,18.36 90 top
U$254  [RESET0]  95.69,19.96 90 top
U$255  [3V30]  98.55,24.64 0 top
U$256  [NC0]  98.55,27.18 0 top
U$257  [GND0]  98.55,29.72 0 top
U$258  [A00]  98.55,32.26 0 top
U$259  [A10]  98.55,34.8 0 top
U$260  [A20]  98.55,37.34 0 top
U$261  [A30]  98.55,39.88 0 top
U$262  [A40]  98.55,42.42 0 top
U$263  [A50]  98.55,44.96 0 top
U$264  [SCK0]  98.65,47.5 0 top
U$265  [00]  86.88,19.83 0 top
U$266  [#12#0]  78.46,43.69 0 bottom
U$267  [#13#0]  78.46,41.15 0 bottom
U$268  [#VUSB#0]  78.46,38.61 0 bottom
U$269  [#VBAT#0]  78.46,33.53 0 bottom
U$270  [#EN#0]  78.46,36.07 0 bottom
U$271  [#A5#0]  98.34,46.24 0 bottom
U$272  [#A4#0]  98.34,43.7 0 bottom
U$273  [#A0#0]  98.34,33.54 0 bottom
U$274  [#GND#0]  98.34,31 0 bottom
U$275  [#NC#0]  98.34,28.46 0 bottom
U$276  [#3V3#0]  98.34,25.92 0 bottom
U$277  [##RESET##0]  98.34,23.38 0 bottom
U$278  [SDI0]  98.58,52.58 0 top
U$279  [SDO0]  98.65,50.04 0 top
U$280  [#RST#0]  98.5,22 0 top
U$281  [USB0]  84.3,23.14 90 bottom
U$282  [110]  78.23,44.96 0 top
U$283  [100]  78.23,47.5 0 top
U$284  [80]  78.23,50.04 0 top
U$285  [60]  78.23,52.58 0 top
U$286  [40]  78.23,55.12 0 top
U$287  [330]  98.55,55.12 0 top
U$288  [340]  98.55,57.66 0 top
U$289  [30]  98.55,60.2 0 top
U$290  [#11#0]  78.44,46.22 0 bottom
U$291  [#8#0]  78.44,51.3 0 bottom
U$292  [#10#0]  78.44,48.76 0 bottom
U$293  [#6#0]  78.44,53.84 0 bottom
U$294  [#4#0]  78.44,56.38 0 bottom
U$295  [#1#SDA#0]  78.44,61.46 0 bottom
U$296  [#2#SCL#0]  78.44,58.92 0 bottom
U$297  [#36#SCK#0]  98.36,48.77 0 bottom
U$298  [#35#COPI#0]  98.36,51.31 0 bottom
U$299  [#37#CIPO#0]  98.36,53.85 0 bottom
U$300  [#33#RX1#0]  98.36,56.39 0 bottom
U$301  [#34#TX1#0]  98.36,58.93 0 bottom
U$302  [#3#0]  98.36,61.47 0 bottom
U$303  [CHG0]  88.95,34.49 90 bottom
U$304  [#46#0]  82.03,54.95 90 bottom
U$305  [#45#0]  84.59,54.99 90 bottom
U$306  [#41#MTDI#0]  89.66,55.01 90 bottom
U$307  [#21#0]  82.05,47.64 90 bottom
U$308  [#26#0]  84.58,47.62 90 bottom
U$309  [#TX0#0]  87.13,47.61 90 bottom
U$310  [#38#0]  89.66,47.6 90 bottom
U$311  [#RX0#0]  87.12,55.02 90 bottom
U$312  [MA0]  87.87,34.56 90 bottom
U$313  [#100#0]  85.99,35.81 90 bottom
U$314  [#500#0]  85.99,33.14 90 bottom
U$315  [ESP32#S20]  88.28,67.06 0 bottom
U$316  [THING_PLUS0]  88.26,65.4 0 bottom
U$317  [THING_PLUS_0]  89.44,40.18 0 top
U$318  [ESP32#S2_0]  89.44,41.39 0 top
U$319  [#A1#0]  98.32,36.08 0 bottom
U$320  [#A2#0]  98.37,38.57 0 bottom
U$321  [#A3#0]  98.38,41.14 0 bottom
U$322  [#CP210X#0]  82.5,21.64 90 bottom
U$323  [#ESP32#0]  82.58,24.36 90 bottom
U$324  [#GPIO18PU#0]  92.3,42.65 0 bottom
U$325  [ORDERING_INSTRUCTIONS]  129.54,60.2 0 top
U$326  [SDA0]  101.6,60.2 0 top
U$327  [SCL0]  101.6,57.66 0 top
U$328  [120]  101.6,42.42 0 top
U$329  [130]  101.6,39.88 0 top
U$330  [130]  105.65,37.97 0 top
U$331  [VUSB0]  102.08,37.34 0 top
U$332  [EN0]  101.6,34.82 0 top
U$333  [VBAT0]  102.39,32.13 0 top
U$334  [CHG0]  122.22,18.36 90 top
U$335  [RESET0]  119.06,19.96 90 top
U$336  [3V30]  121.92,24.64 0 top
U$337  [NC0]  121.92,27.18 0 top
U$338  [GND0]  121.92,29.72 0 top
U$339  [A00]  121.92,32.26 0 top
U$340  [A10]  121.92,34.8 0 top
U$341  [A20]  121.92,37.34 0 top
U$342  [A30]  121.92,39.88 0 top
U$343  [A40]  121.92,42.42 0 top
U$344  [A50]  121.92,44.96 0 top
U$345  [SCK0]  122.02,47.5 0 top
U$346  [00]  110.24,19.83 0 top
U$347  [#12#0]  101.83,43.69 0 bottom
U$348  [#13#0]  101.83,41.15 0 bottom
U$349  [#VUSB#0]  101.83,38.61 0 bottom
U$350  [#VBAT#0]  101.83,33.53 0 bottom
U$351  [#EN#0]  101.83,36.07 0 bottom
U$352  [#A5#0]  121.71,46.24 0 bottom
U$353  [#A4#0]  121.71,43.7 0 bottom
U$354  [#A0#0]  121.71,33.54 0 bottom
U$355  [#GND#0]  121.71,31 0 bottom
U$356  [#NC#0]  121.71,28.46 0 bottom
U$357  [#3V3#0]  121.71,25.92 0 bottom
U$358  [##RESET##0]  121.71,23.38 0 bottom
U$359  [SDI0]  121.95,52.58 0 top
U$360  [SDO0]  122.02,50.04 0 top
U$361  [#RST#0]  121.87,22 0 top
U$362  [USB0]  107.67,23.14 90 bottom
U$363  [110]  101.6,44.96 0 top
U$364  [100]  101.6,47.5 0 top
U$365  [80]  101.6,50.04 0 top
U$366  [60]  101.6,52.58 0 top
U$367  [40]  101.6,55.12 0 top
U$368  [330]  121.92,55.12 0 top
U$369  [340]  121.92,57.66 0 top
U$370  [30]  121.92,60.2 0 top
U$371  [#11#0]  101.8,46.22 0 bottom
U$372  [#8#0]  101.8,51.3 0 bottom
U$373  [#10#0]  101.8,48.76 0 bottom
U$374  [#6#0]  101.8,53.84 0 bottom
U$375  [#4#0]  101.8,56.38 0 bottom
U$376  [#1#SDA#0]  101.8,61.46 0 bottom